# Altium PCB ARM2toARM6Adapter.pcbdoc
Units mm, origin at the board's own origin, x right, y up, seen from the top; angles counter-clockwise.
Board outline 42.62 x 48.77 mm, 4 copper layers (TopLayer, GND, VCC, BottomLayer), stack 1.659 mm thick; 38 components, 87 nets, 340 pads, 154 vias.
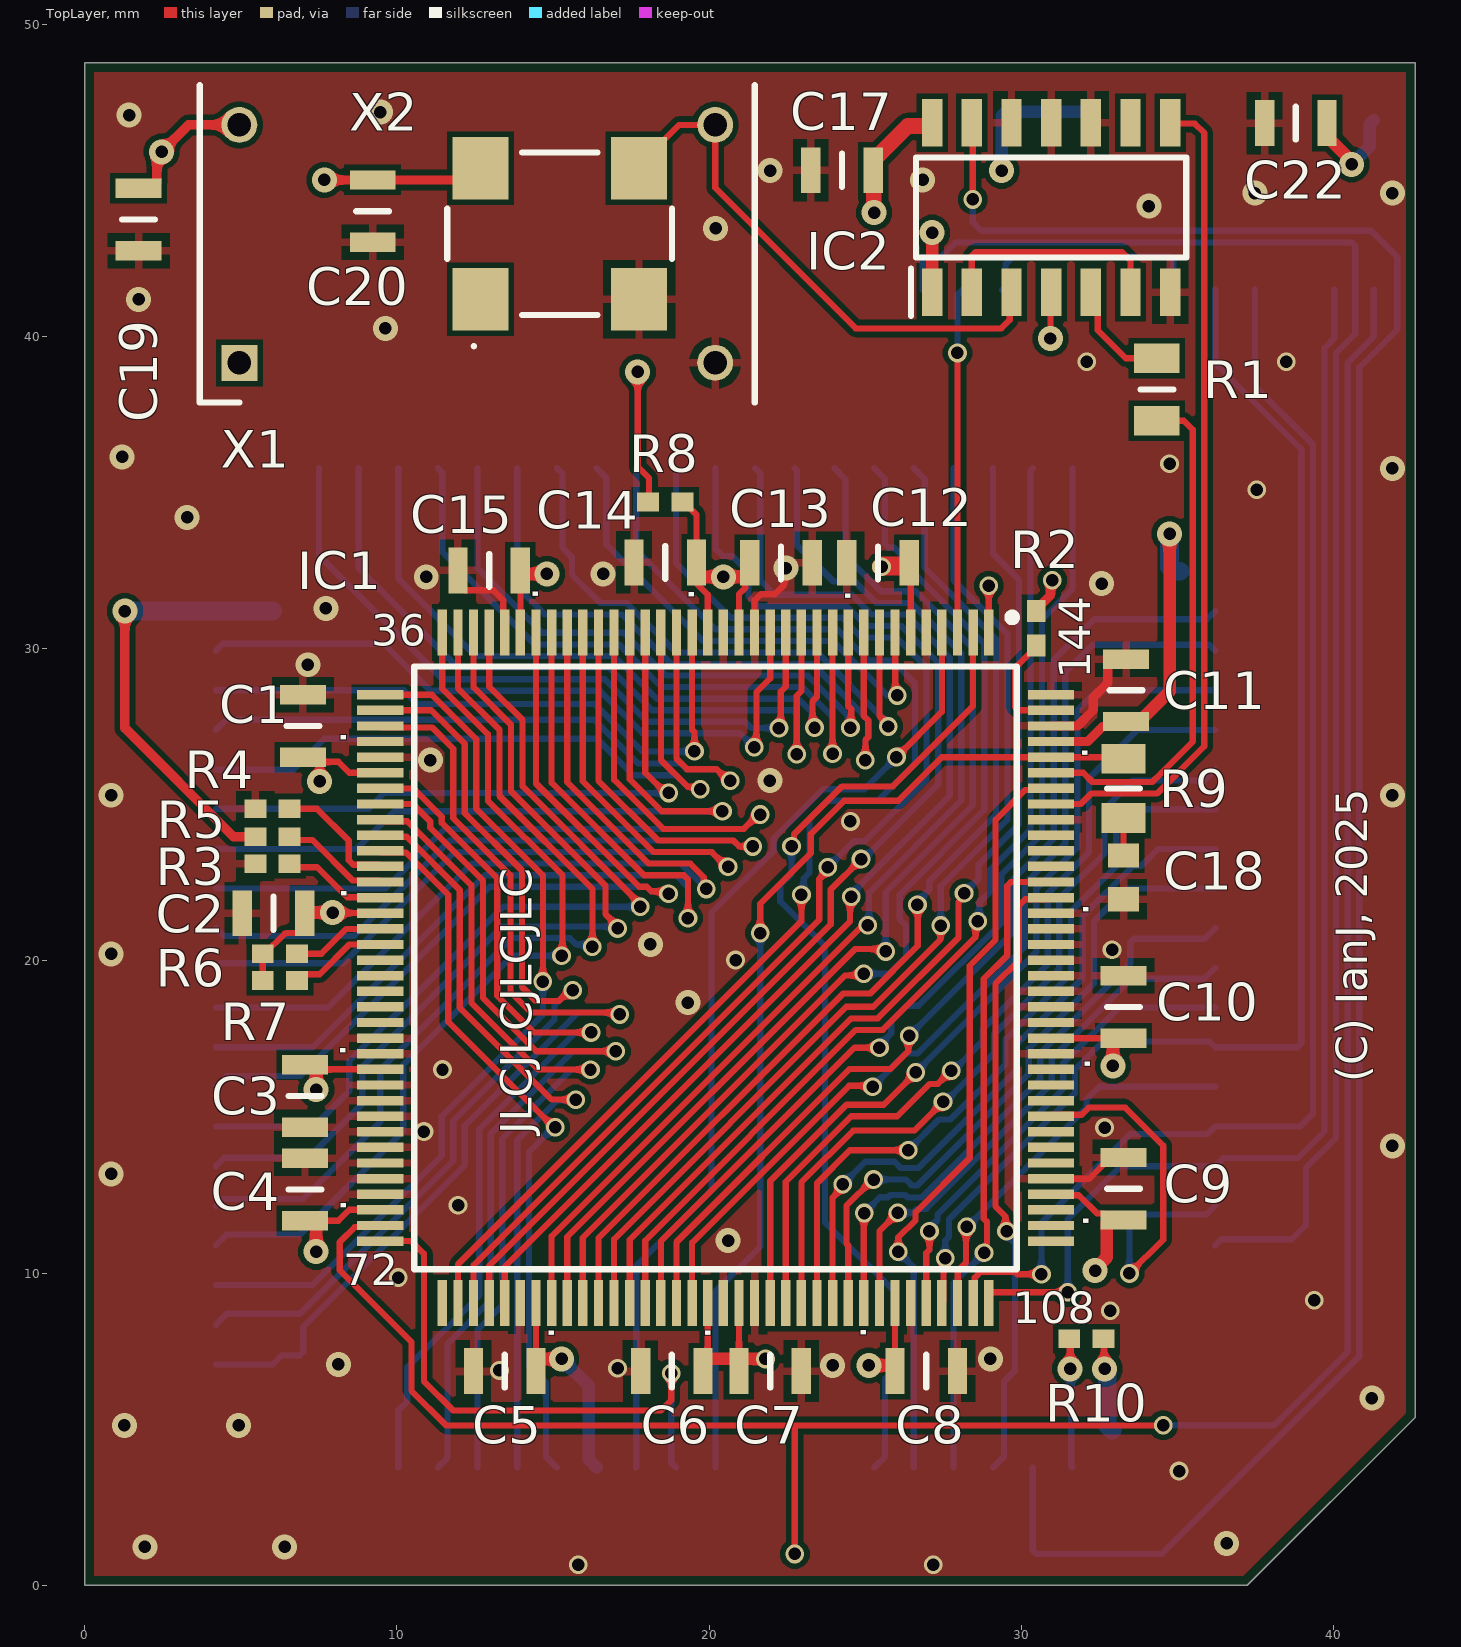
[diagram p0: TopLayer view]
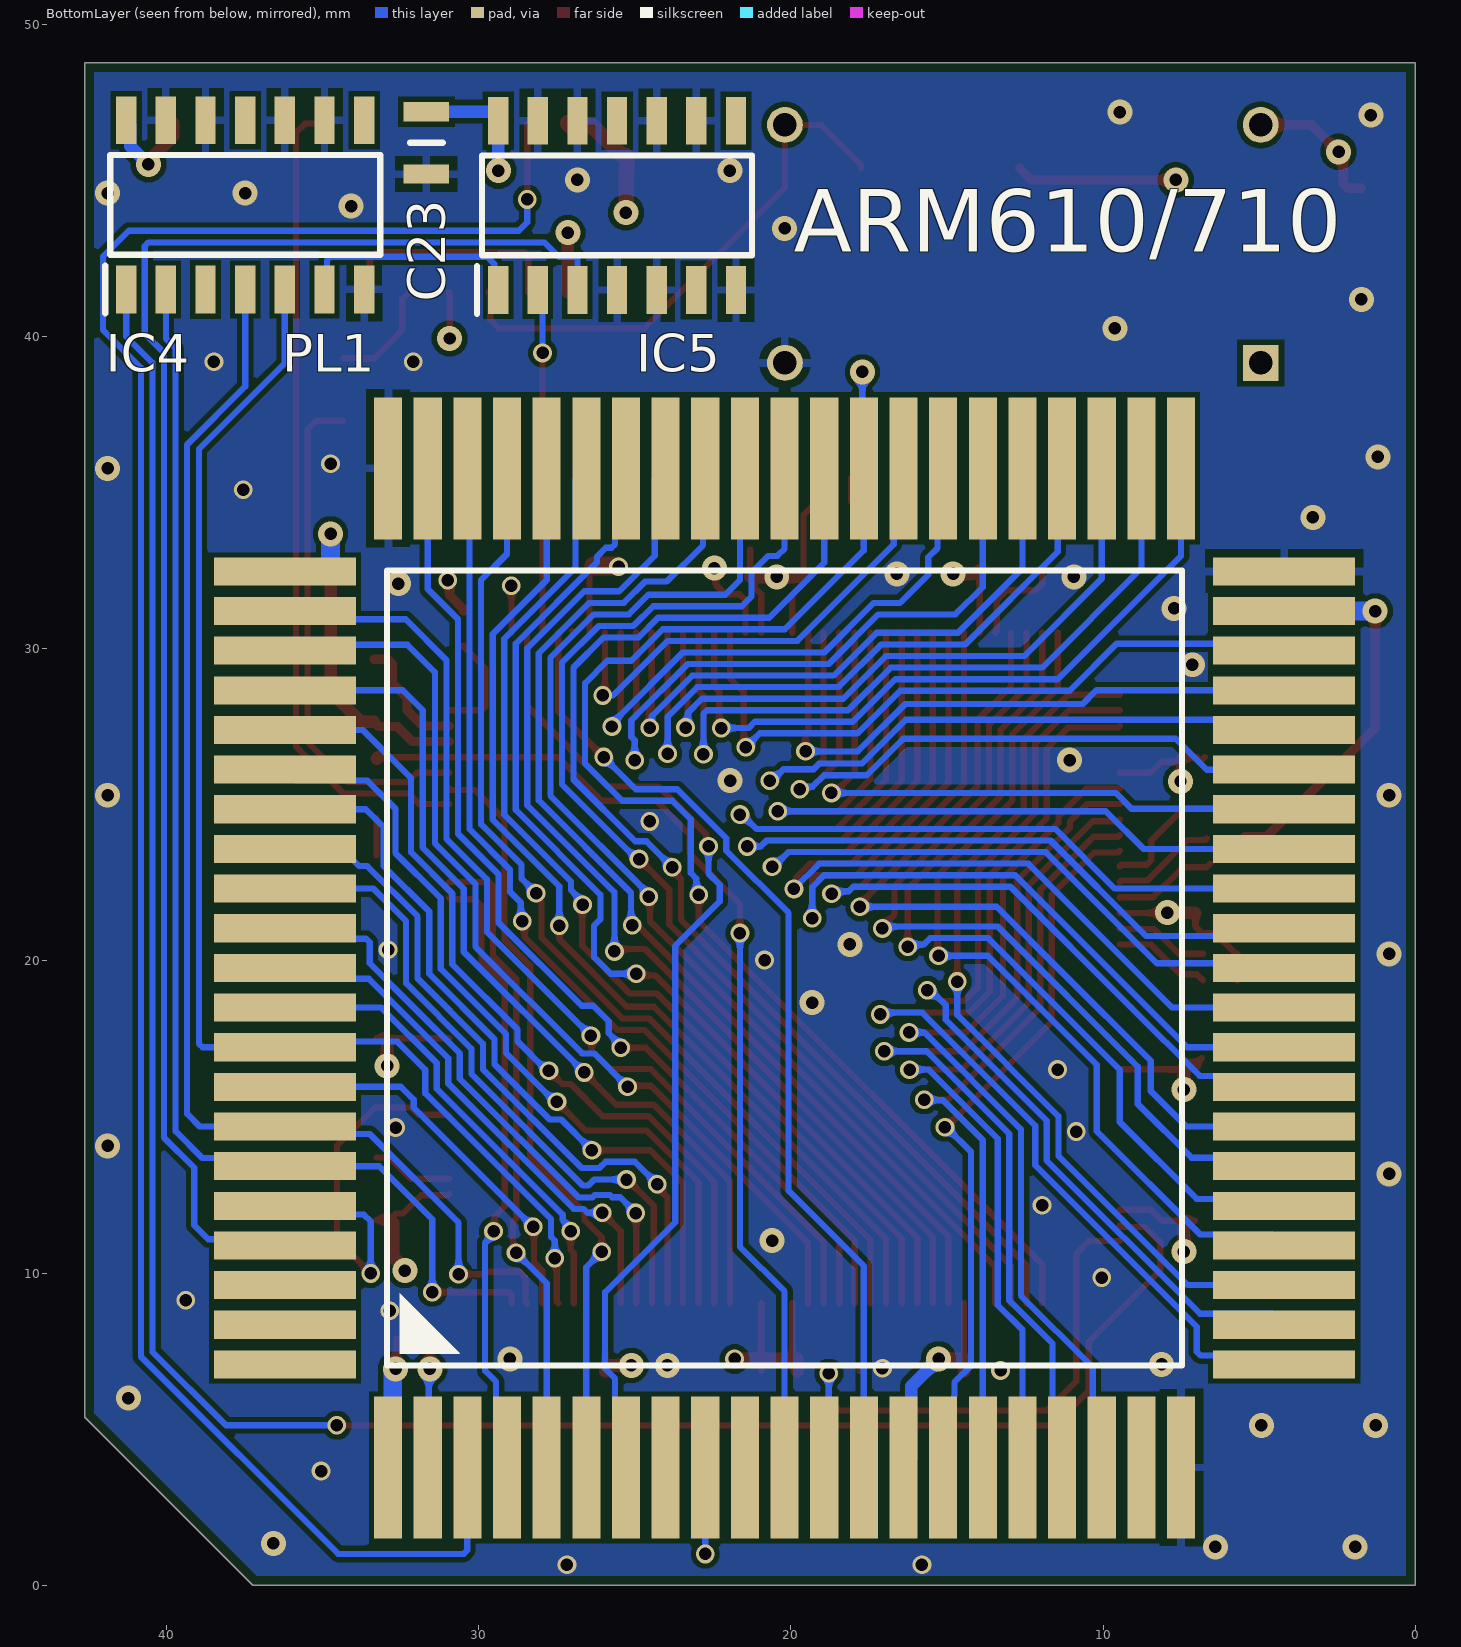
[diagram p1: BottomLayer view, seen from below]
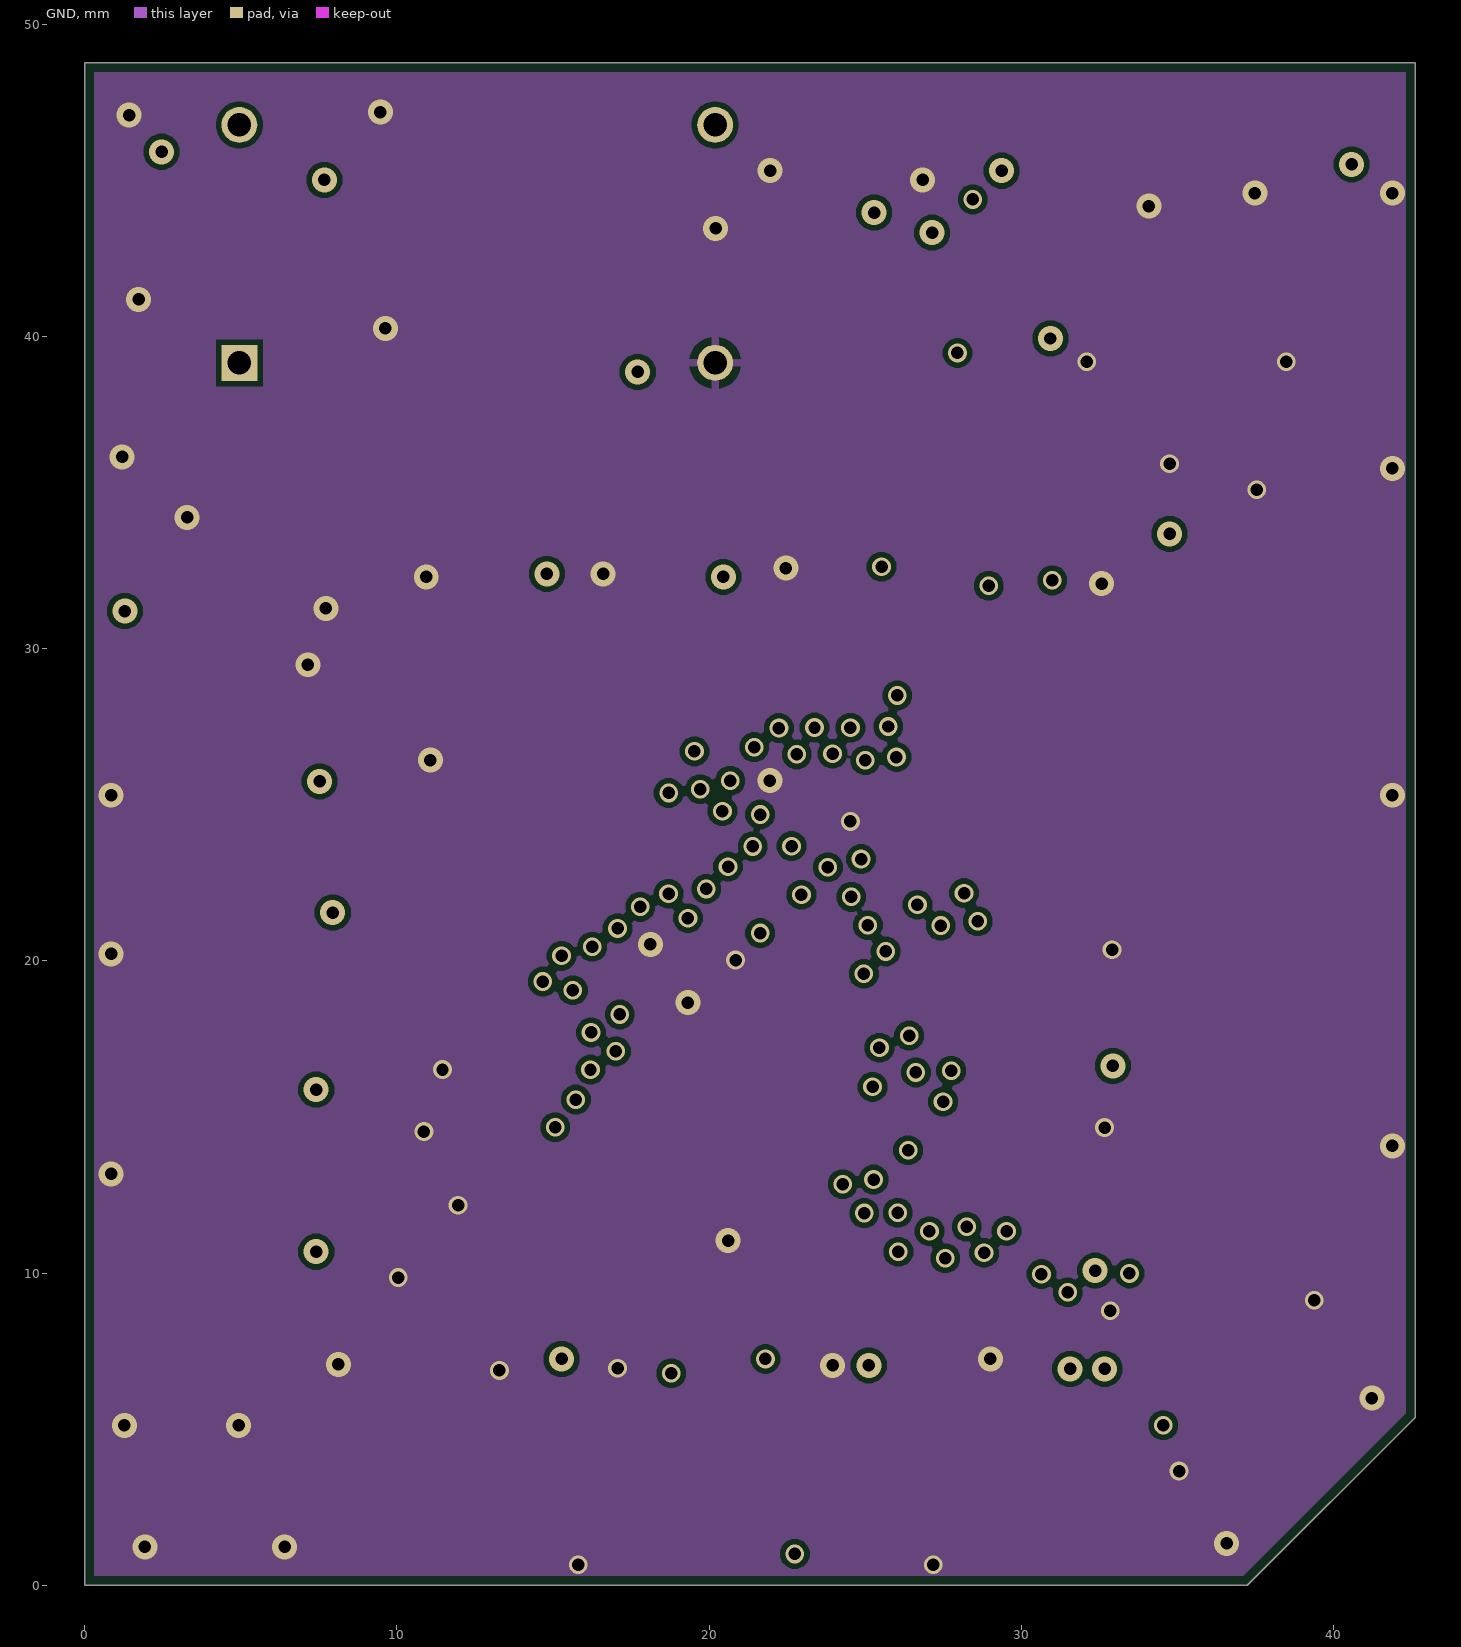
[diagram p2: GND]
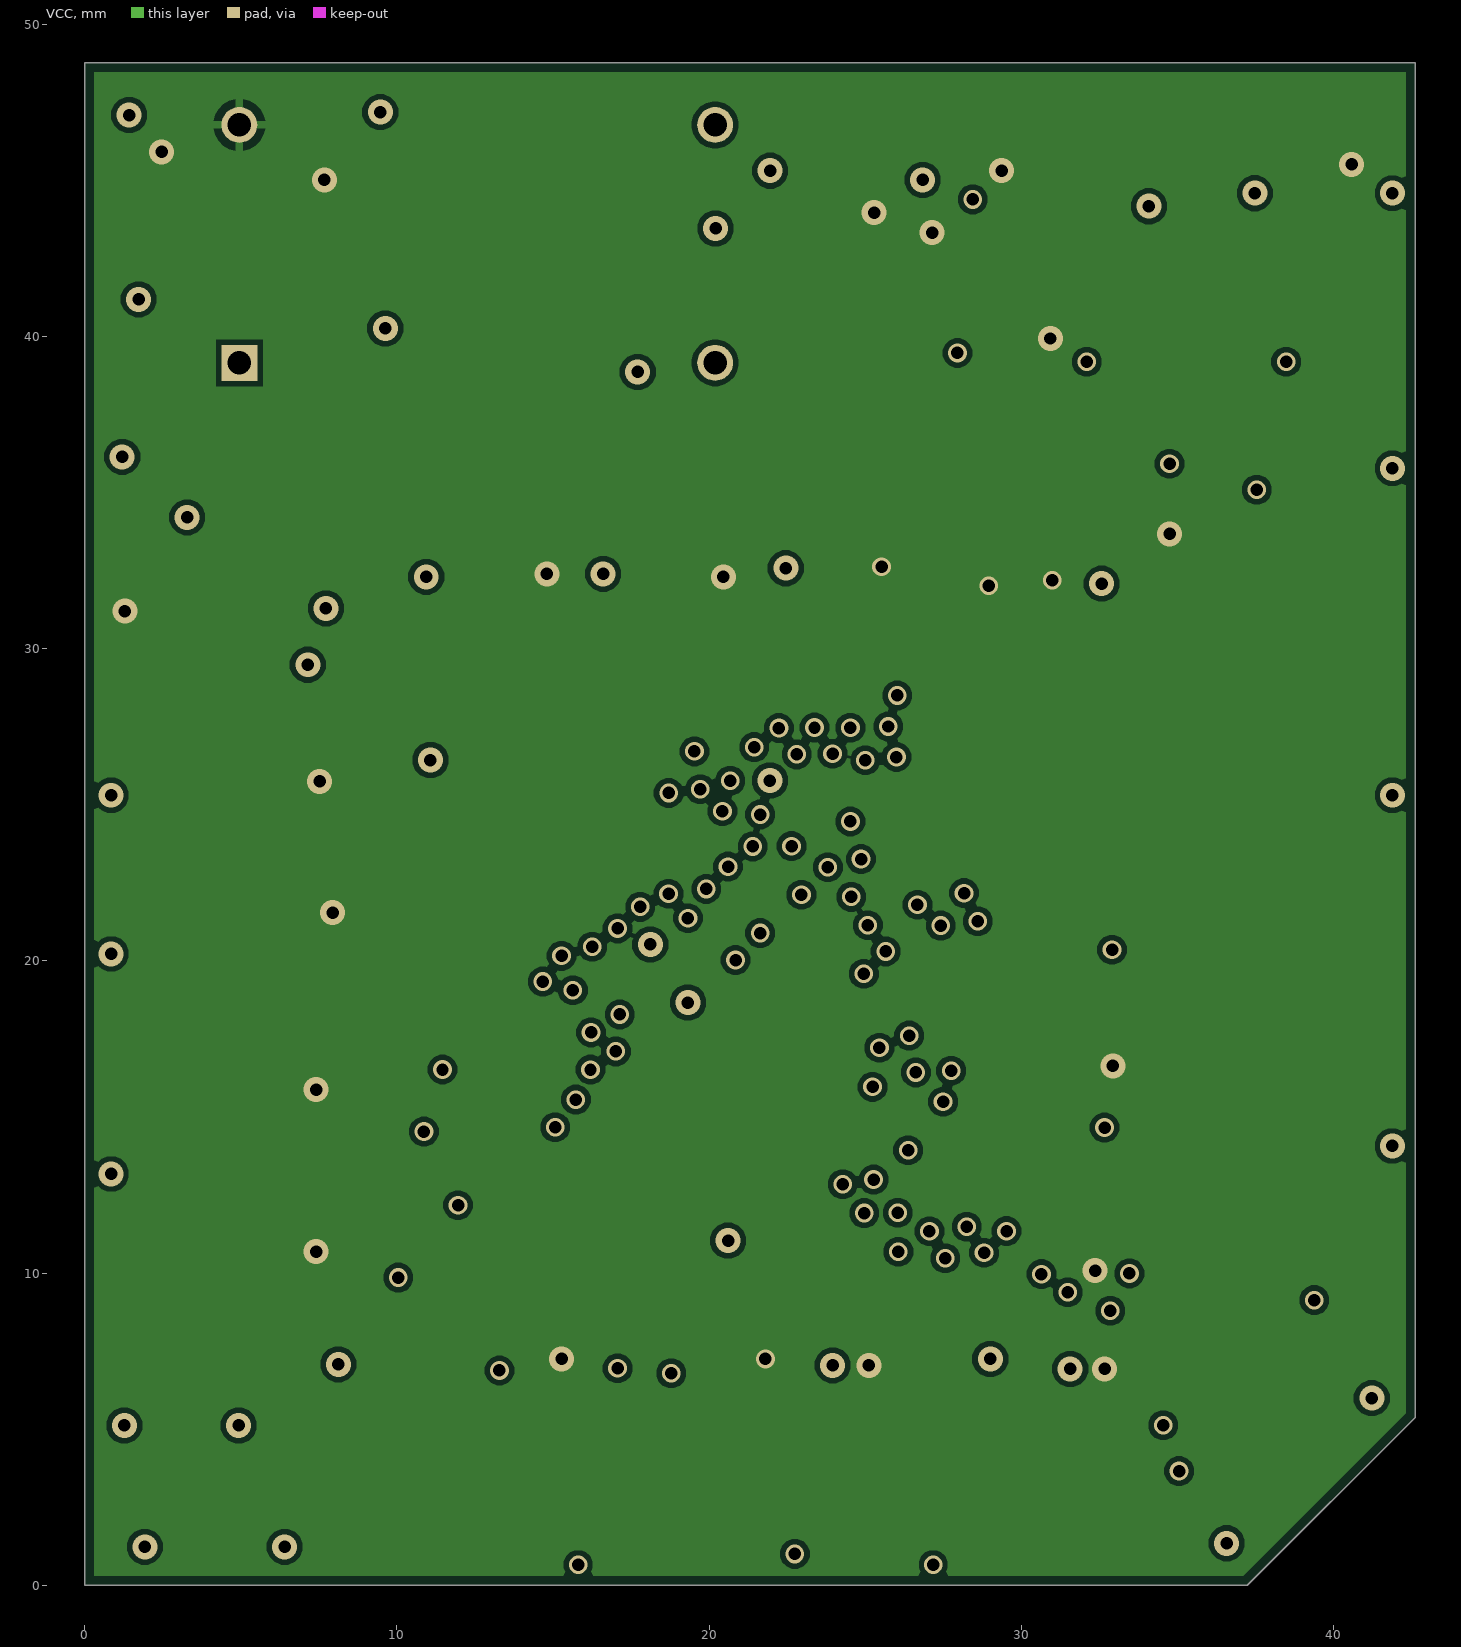
[diagram p3: VCC]
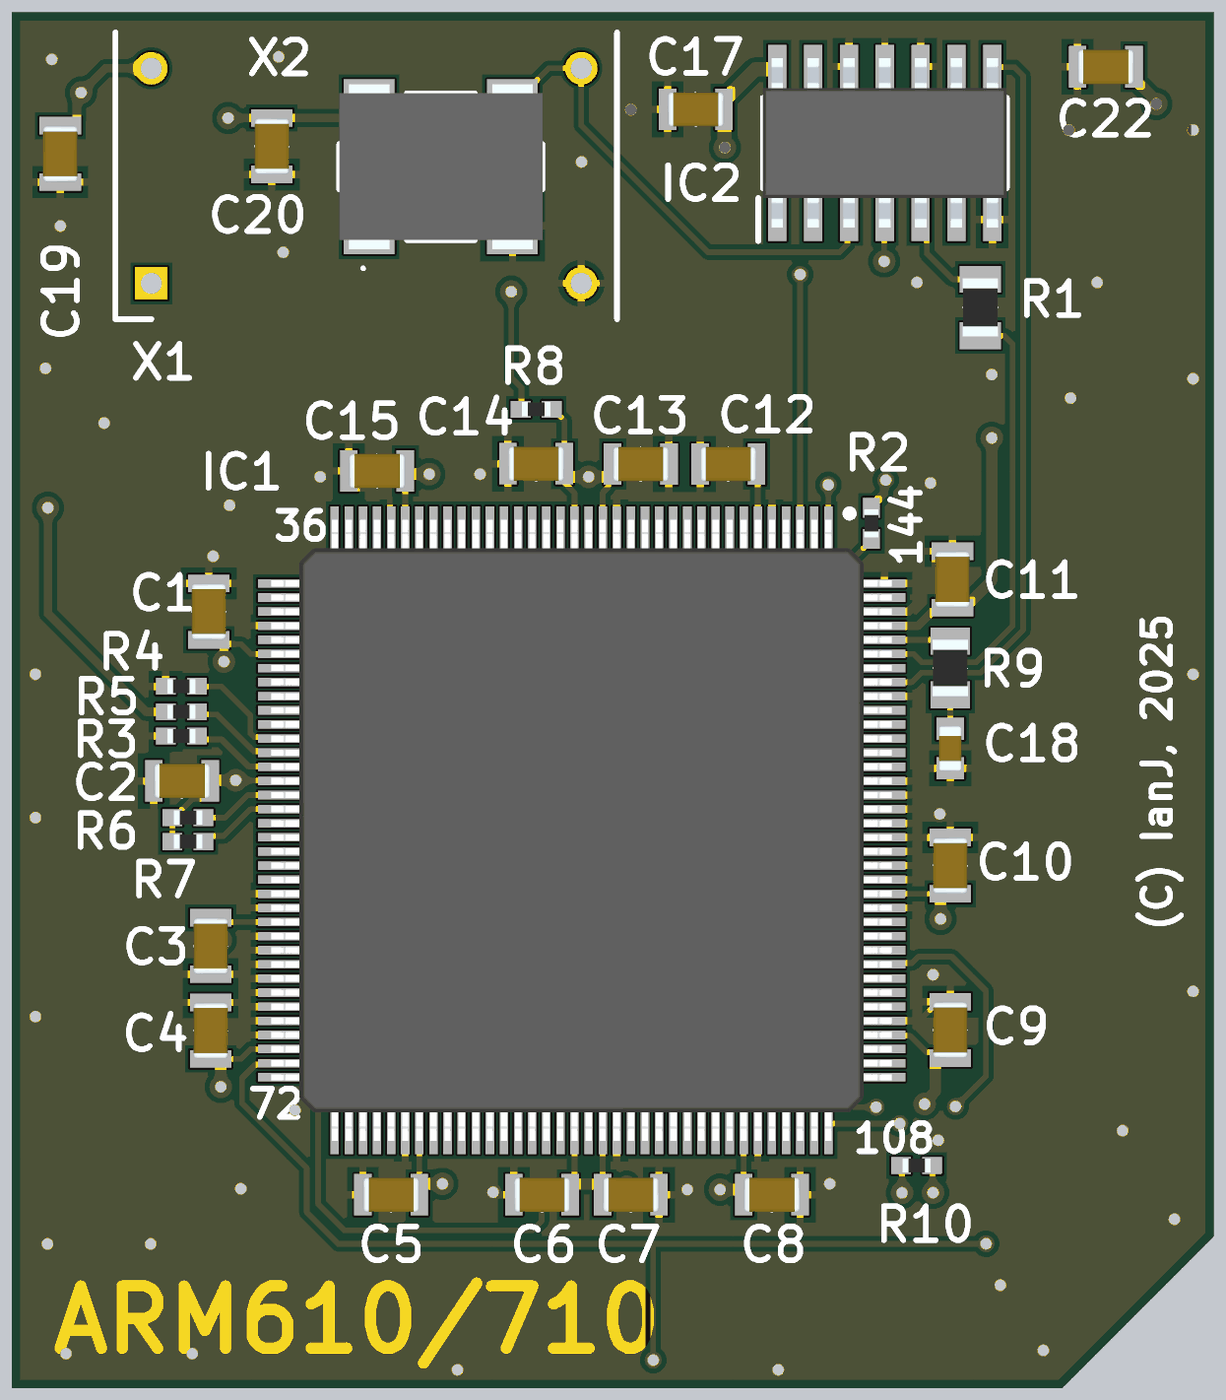
[diagram p4: 3D render of the assembled board from above, using the file's embedded part models]
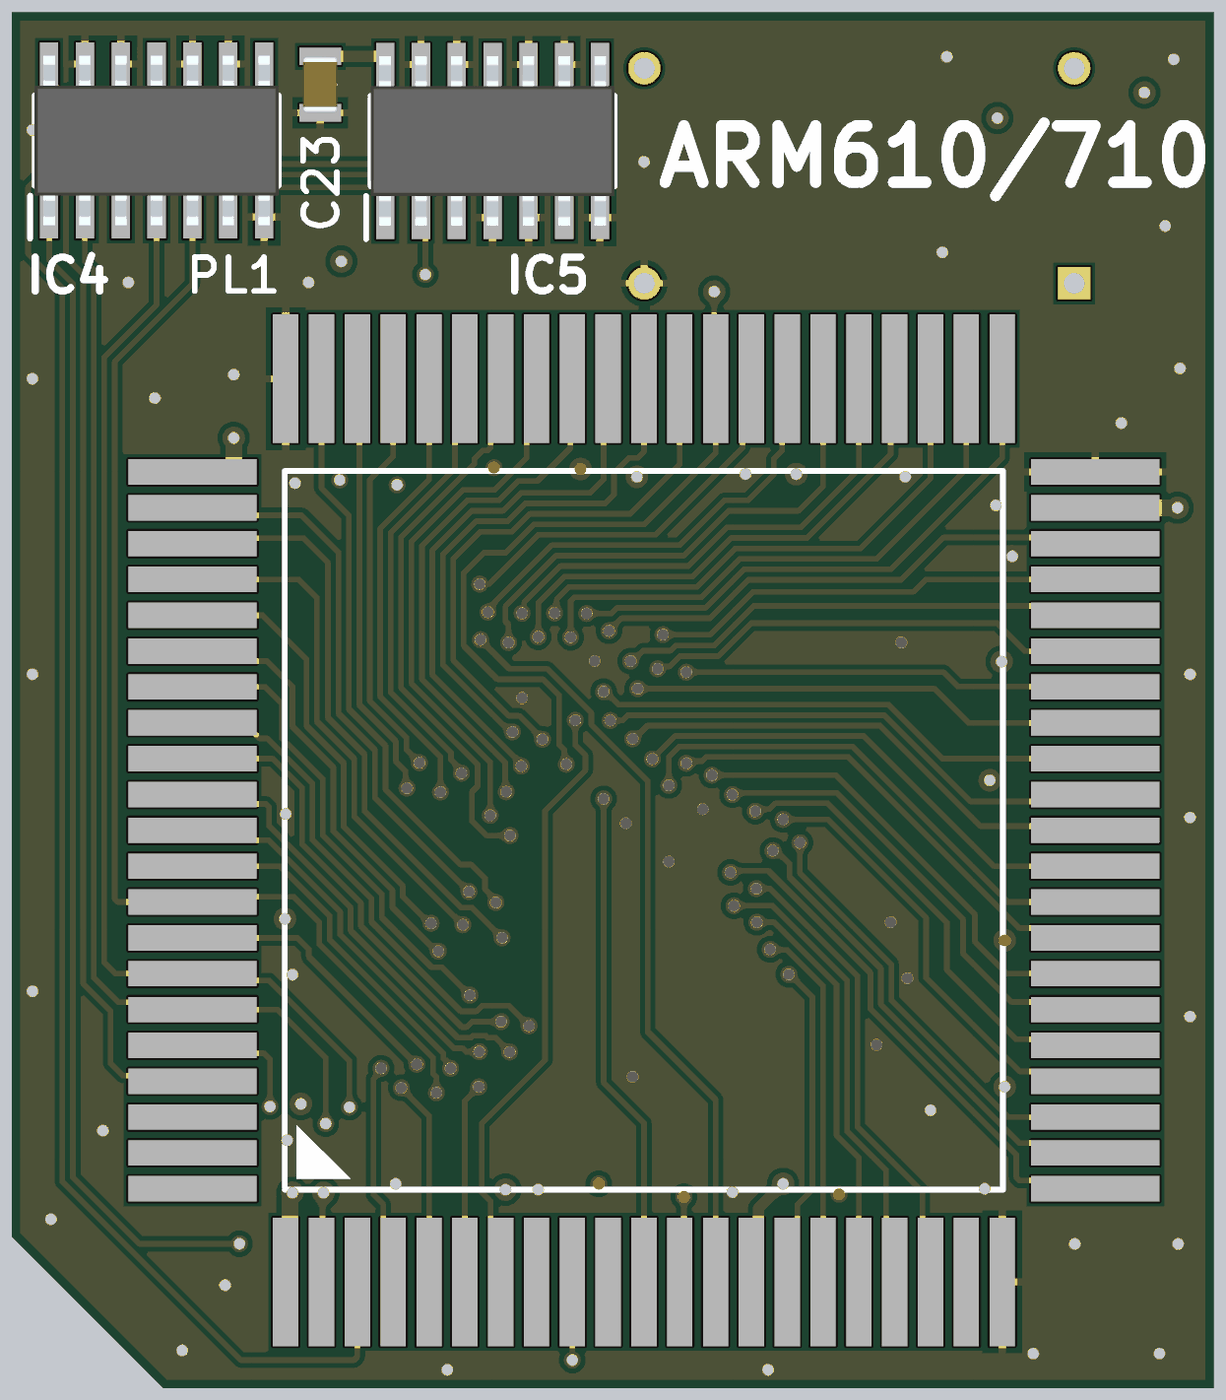
[diagram p5: 3D render of the assembled board from below, using the file's embedded part models]

## Layer stack, top to bottom
TopSolder: solder mask 0.01, Solder Resist, Dk 3.5
TopLayer: signal copper 0.036
Dielectric 1: prepreg 0.2083, PP-022, Dk 4.5
GND: signal copper 0.035
Dielectric 2: core 1.1, Core-043, Dk 4.3
VCC: signal copper 0.035
Dielectric 3: prepreg 0.2083, PP-022, Dk 4.5
BottomLayer: signal copper 0.036
BottomSolder: solder mask 0.01, Solder Resist, Dk 3.5

## Board outline
37.236,0 42.621,5.385 42.621,48.768 0,48.768 0,0

## Design rules (kind name [scope] priority, off if disabled: settings)
BoardOutlineClearance [All] p1: gap=0.3 ignorepadtopadclearanceinfootprint=FALSE
Clearance [All] p1: gap=0.17 ignorepadtopadclearanceinfootprint=FALSE except(0.3: Via-Via; 0.5: Via-Hole)
ComponentClearance ComponentClearance_Z2_Z3 [(InComponent('Z2') OR InComponent('Z3')) vs InComponent('No Component')] p1: gap=0 collisioncheckmode=3 verticalgap=0 showdistances=FALSE
ComponentClearance ComponentClearance_U4_J104 [All] p2: gap=0 collisioncheckmode=3 verticalgap=0 showdistances=FALSE
ComponentClearance ComponentClearance_J3_J4 [InComponent('J3') vs InComponent('J4')] p3: gap=0 collisioncheckmode=3 verticalgap=0 showdistances=FALSE
ComponentClearance ComponentClearance_J103_J104 [InComponent('J103') vs InComponent('J104')] p4: gap=0 collisioncheckmode=3 verticalgap=0 showdistances=FALSE
ComponentClearance [All] p5: gap=0.254 collisioncheckmode=3 verticalgap=0.254 showdistances=FALSE
DiffPairsRouting [InDifferentialPairClass('All Differential Pairs')] p1: maxlimit=0.254 minlimit=0.114 mostfreqgap=0.17 toplayer_mingap=0.17 toplayer_minwidth=0.2 toplayer_maxwidth=0.381 toplayer_prefwidth=0.237 midlayer1_prefgap=0.115 midlayer1_minwidth=0.381 midlayer1_maxwidth=0.381 midlayer1_prefwidth=0.381 midlayer2_prefgap=0.115 midlayer2_minwidth=0.381 midlayer2_maxwidth=0.381 midlayer2_prefwidth=0.381 bottomlayer_mingap=0.17 bottomlayer_minwidth=0.2 bottomlayer_maxwidth=0.381 bottomlayer_prefwidth=0.237 maxuncoupledlength=12.7
FabricationTestPointUsage TestPointUsage [All] p1: valid=0 allowmultiple=FALSE
FabricationTestpoint Testpoint [All] p1: side=3 testpointundercomponent=TRUE minsize=1.016 maxsize=2.54 preferedsize=1.524 minholesize=0.508 maxholesize=1.016 preferedholesize=0.813 testpointgrid=0.025 allowsidetop=TRUE allowsidebottom=TRUE usegrid=TRUE gridtolerance=0
HoleSize [All] p1: absolutevalues=TRUE maxlimit=5.5 minlimit=0.2 maxpercent=80.000 minpercent=20.000
HoleToHoleClearance [All] p1: gap=0.25 allowstackedmicrovias=FALSE
MinimumSolderMaskSliver [All] p1: minsoldermaskwidth=0.02
PlaneClearance [All] p1: clearance=0.2
PlaneConnect [All] p1: pad.planeconnectstyle=Relief pad.reliefexpansion=0.508 pad.reliefentries=4 pad.reliefconductorwidth=0.254 pad.reliefairgap=0.254 via.planeconnectstyle=Direct via.reliefexpansion=0.508 via.reliefentries=4 via.reliefconductorwidth=0.254 via.reliefairgap=0.254
PolygonConnect [All] p1: thpad.connectstyle=Relief thpad.reliefconductorwidth=0.254 thpad.reliefentries=4 thpad.polygonreliefangle="90 Angle" thpad.airgapwidth=0.254 smdpad.connectstyle=Relief smdpad.reliefconductorwidth=0.254 smdpad.reliefentries=4 smdpad.polygonreliefangle="90 Angle" smdpad.airgapwidth=0.254 via.connectstyle=Direct via.reliefconductorwidth=0.254 via.reliefentries=4 via.polygonreliefangle="90 Angle" via.airgapwidth=0.254
RoutingVias [All] p1: holewidth=0.2 width=0.4 viastyle="Through Hole" minholewidth=0.2 minwidth=0.4 maxholewidth=0.4 maxwidth=0.8
SilkToSilkClearance [All] p1: silktosilkclearance=0.1
SilkToSolderMaskClearance SilkscreenOverComponentPads [IsPad] p1: minsilkscreentomaskgap=0.1 clearancetoexposedcopper=TRUE
SolderMaskExpansion [All] p1: expansion=0.075 istentingtop=FALSE
SupplyNets "Schematic Supply Nets_2" [InNet('VCC')] p1: voltage=0.000
SupplyNets "Schematic Supply Nets_1" [InNet('GND')] p2: voltage=0.000
Width [All] p1: maxlimit=5 minlimit=0.15 preferedwidth=0.2
19 further rules are at their usual default settings.

## Classes and differential pairs
net class D[0..31]: D0 D1 D2 D3 D4 D5 D6 D7 D8 D9 D10 D11 D12 D13 D14 D15 D16 D17 D18 D19 D20 D21 D22 D23 D24 D25 D26 D27 D28 D29 D30 D31
net class A[0..25]: A0 A1 A2 A3 A4 A5 A6 A7 A8 A9 A10 A11 A12 A13 A14 A15 A16 A17 A18 A19 A20 A21 A22 A23 A24 A25

## Components (designator, comment, footprint, x,y, rotation, side; value= is the part's Value field where it differs from the comment)
C1 "100nF" CAPC2012X145N 6.989,27.525 r90 top
C2 "100nF" CAPC2012X145N 6.045,21.525 r180 top
C3 "100nF" CAPC2012X145N 7.055,15.675 r270 top
C4 "100nF" CAPC2012X145N 7.055,12.675 r90 top
C5 "100nF" CAPC2012X145N 13.455,6.862 r180 top
C6 "100nF" CAPC2012X145N 18.805,6.862 r180 top
C7 "100nF" CAPC2012X145N 21.955,6.862 r0 top
C8 "100nF" CAPC2012X145N 26.955,6.862 r0 top
C9 "100nF" CAPC2012X145N 33.274,12.702 r90 top
C10 "100nF" CAPC2012X145N 33.274,18.525 r90 top
C11 "100nF" CAPC2012X145N 33.355,28.665 r90 top
C12 "100nF" CAPC2012X145N 25.407,32.751 r180 top
C13 "100nF" CAPC2012X145N 22.305,32.751 r0 top
C14 "100nF" CAPC2012X145N 18.596,32.765 r180 top
C15 "100nF" CAPC2012X145N 12.955,32.506 r180 top
C17 "100nF" CAPC2012X145N 24.256,45.323 r180 top
C18 "22pF" CAPC1608X90N 33.274,22.675 r90 top
C19 "100nF" CAPC2012X145N 1.727,43.743 r270 top
C20 "100nF" CAPC2012X145N 9.225,44.013 r270 top
C22 "100nF" CAPC2012X145N 38.791,46.832 r180 top
C23 "100nF" CAPC2012X145N 31.681,46.201 r270 bottom
IC1 "ARM610" TQFP144 20.205,19.775 r270 top locked
IC2 "CD74ACT74M" SOIC127P600X175-14N 30.955,44.13 r90 top locked
IC4 "74HC20D,652" SOIC127P600X175-14N 37.481,44.215 r90 bottom
IC5 "74ACT08MTC" SOIC127P600X175-14N 25.57,44.199 r90 bottom
PL1 "PLCC84 PLUG (ARM2)" PLCC84_PLUG 20.205,19.775 r0 bottom locked
R1 "CRCW080568R0FKEA" RESC2012X50N 34.341,38.303 r270 top value=68R
R2 "4K7" RESC1005X35N 30.478,30.655 r90 top
R3 "4K7" RESC1005X35N 6.015,23.115 r0 top
R4 "10K" RESC1005X35N 6.015,24.876 r0 top
R5 "4K7" RESC1005X35N 6.015,23.975 r180 top
R6 "4K7" RESC1005X35N 6.254,20.225 r180 top
R7 "4K7" RESC1005X35N 6.254,19.375 r180 top
R8 "4K7" RESC1005X35N 18.596,34.695 r0 top
R9 "100R" RESC2012X60N 33.274,25.525 r90 top
R10 "4K7" RESC1005X35N 32.085,7.895 r0 top
X1 "60MHz OSC (THT)" DIPS762W56P1524L1778H241Q4N 4.953,39.156 r90 top
X2 "60MHz OSC (SMT)" LFSPXO018035Bulk 15.215,43.289 r0 top

## Footprints (in the part's own frame and the unit in brackets; to place one, negate y for a bottom-side part, rotate by r counter-clockwise, add the part's x,y. Pads: shape width x height; smd on the part's side, far side on the other; paste and mask are expansions set on the pad)
CAPC1608X90N [mm]
  rect 0.78x0.99 smd: 1(-0.7,0) 2(0.7,0)
  body extent -0.8,-0.41 0.8,0.41, height 0.9
CAPC2012X145N [mm]
  rect 0.62x1.47 smd: 1(-1,0) 2(1,0)
  silkscreen extent 0,-0.53 0,0.53, body extent -1,-0.63 1,0.63, height 1.45
DIPS762W56P1524L1778H241Q4N [mm]
  rect 1.15x1.15 hole 0.75: 1(0,0)
  round 1.15 hole 0.75: 2(0,-15.24) 3(7.62,-15.24) 4(7.62,0)
  silkscreen extent -1.27,-16.51 8.89,1.27
LFSPXO018035Bulk [mm]
  rect 1.8x2 smd: 1(-2.54,-2.1) 2(2.54,-2.1) 3(2.54,2.1) 4(-2.54,2.1)
  silkscreen extent -3.6,-3.65 3.6,2.6, body extent -3.6,-2.92 3.6,2.92, height 1.5
PLCC84_PLUG [mm] "PLCC84 plug (reversed pin map)"
  rect 0.9x4.55 smd: 1(0,16.002) 2(1.27,16.002) 3(2.54,16.002) 4(3.81,16.002) 5(5.08,16.002) 6(6.35,16.002) 7(7.62,16.002) 8(8.89,16.002) 9(10.16,16.002) 10(11.43,16.002) 11(12.7,16.002) 33(12.7,-16.002) 34(11.43,-16.002) 35(10.16,-16.002) 36(8.89,-16.002) 37(7.62,-16.002) 38(6.35,-16.002) 39(5.08,-16.002) 40(3.81,-16.002) 41(2.54,-16.002) 42(1.27,-16.002) 43(0,-16.002) 44(-1.27,-16.002) 45(-2.54,-16.002) 46(-3.81,-16.002) 47(-5.08,-16.002) 48(-6.35,-16.002) 49(-7.62,-16.002) 50(-8.89,-16.002) 51(-10.16,-16.002) 52(-11.43,-16.002) 53(-12.7,-16.002) 75(-12.7,16.002) 76(-11.43,16.002) 77(-10.16,16.002) 78(-8.89,16.002) 79(-7.62,16.002) 80(-6.35,16.002) 81(-5.08,16.002) 82(-3.81,16.002) 83(-2.54,16.002) 84(-1.27,16.002)
  rect 4.55x0.9 smd: 12(16.002,12.7) 13(16.002,11.43) 14(16.002,10.16) 15(16.002,8.89) 16(16.002,7.62) 17(16.002,6.35) 18(16.002,5.08) 19(16.002,3.81) 20(16.002,2.54) 21(16.002,1.27) 22(16.002,0) 23(16.002,-1.27) 24(16.002,-2.54) 25(16.002,-3.81) 26(16.002,-5.08) 27(16.002,-6.35) 28(16.002,-7.62) 29(16.002,-8.89) 30(16.002,-10.16) 31(16.002,-11.43) 32(16.002,-12.7) 54(-16.002,-12.7) 55(-16.002,-11.43) 56(-16.002,-10.16) 57(-16.002,-8.89) 58(-16.002,-7.62) 59(-16.002,-6.35) 60(-16.002,-5.08) 61(-16.002,-3.81) 62(-16.002,-2.54) 63(-16.002,-1.27) 64(-16.002,0) 65(-16.002,1.27) 66(-16.002,2.54) 67(-16.002,3.81) 68(-16.002,5.08) 69(-16.002,6.35) 70(-16.002,7.62) 71(-16.002,8.89) 72(-16.002,10.16) 73(-16.002,11.43) 74(-16.002,12.7)
  silkscreen extent -12.73,-12.73 12.73,12.73
RESC1005X35N [mm]
  rect 0.7x0.6 smd: 1(-0.55,0) 2(0.55,0)
  body extent -0.5,-0.25 0.5,0.25, height 0.35
RESC2012X50N [mm]
  rect 0.95x1.45 smd: 1(-1,0) 2(1,0)
  silkscreen extent 0,-0.53 0,0.53, body extent -1.02,-0.63 1.02,0.63, height 0.5
RESC2012X60N [mm]
  rect 0.95x1.4 smd: 1(-0.95,0) 2(0.95,0)
  silkscreen extent 0,-0.53 0,0.53, body extent -1,-0.63 1,0.63, height 0.6
SOIC127P600X175-14N [mm]
  rect 1.525x0.65 smd: 1(-2.712,3.81) 2(-2.712,2.54) 3(-2.712,1.27) 4(-2.712,0) 5(-2.712,-1.27) 6(-2.712,-2.54) 7(-2.712,-3.81) 8(2.712,-3.81) 9(2.712,-2.54) 10(2.712,-1.27) 11(2.712,0) 12(2.712,1.27) 13(2.712,2.54) 14(2.712,3.81)
  silkscreen extent -3.47,-4.33 1.6,4.48, body extent -3,-4.33 3,4.33, height 1.75
TQFP144 [mm]
  rect 1.475x0.3 smd: 1(-10.738,8.75) 2(-10.738,8.25) 3(-10.738,7.75) 4(-10.738,7.25) 5(-10.738,6.75) 6(-10.738,6.25) 7(-10.738,5.75) 8(-10.738,5.25) 9(-10.738,4.75) 10(-10.738,4.25) 11(-10.738,3.75) 12(-10.738,3.25) 13(-10.738,2.75) 14(-10.738,2.25) 15(-10.738,1.75) 16(-10.738,1.25) 17(-10.738,0.75) 18(-10.738,0.25) 19(-10.738,-0.25) 20(-10.738,-0.75) 21(-10.738,-1.25) 22(-10.738,-1.75) 23(-10.738,-2.25) 24(-10.738,-2.75) 25(-10.738,-3.25) 26(-10.738,-3.75) 27(-10.738,-4.25) 28(-10.738,-4.75) 29(-10.738,-5.25) 30(-10.738,-5.75) 31(-10.738,-6.25) 32(-10.738,-6.75) 33(-10.738,-7.25) 34(-10.738,-7.75) 35(-10.738,-8.25) 36(-10.738,-8.75) 73(10.738,-8.75) 74(10.738,-8.25) 75(10.738,-7.75) 76(10.738,-7.25) 77(10.738,-6.75) 78(10.738,-6.25) 79(10.738,-5.75) 80(10.738,-5.25) 81(10.738,-4.75) 82(10.738,-4.25) 83(10.738,-3.75) 84(10.738,-3.25) 85(10.738,-2.75) 86(10.738,-2.25) 87(10.738,-1.75) 88(10.738,-1.25) 89(10.738,-0.75) 90(10.738,-0.25) 91(10.738,0.25) 92(10.738,0.75) 93(10.738,1.25) 94(10.738,1.75) 95(10.738,2.25) 96(10.738,2.75) 97(10.738,3.25) 98(10.738,3.75) 99(10.738,4.25) 100(10.738,4.75) 101(10.738,5.25) 102(10.738,5.75) 103(10.738,6.25) 104(10.738,6.75) 105(10.738,7.25) 106(10.738,7.75) 107(10.738,8.25) 108(10.738,8.75)
  rect 0.3x1.475 smd: 37(-8.75,-10.738) 38(-8.25,-10.738) 39(-7.75,-10.738) 40(-7.25,-10.738) 41(-6.75,-10.738) 42(-6.25,-10.738) 43(-5.75,-10.738) 44(-5.25,-10.738) 45(-4.75,-10.738) 46(-4.25,-10.738) 47(-3.75,-10.738) 48(-3.25,-10.738) 49(-2.75,-10.738) 50(-2.25,-10.738) 51(-1.75,-10.738) 52(-1.25,-10.738) 53(-0.75,-10.738) 54(-0.25,-10.738) 55(0.25,-10.738) 56(0.75,-10.738) 57(1.25,-10.738) 58(1.75,-10.738) 59(2.25,-10.738) 60(2.75,-10.738) 61(3.25,-10.738) 62(3.75,-10.738) 63(4.25,-10.738) 64(4.75,-10.738) 65(5.25,-10.738) 66(5.75,-10.738) 67(6.25,-10.738) 68(6.75,-10.738) 69(7.25,-10.738) 70(7.75,-10.738) 71(8.25,-10.738) 72(8.75,-10.738) 109(8.75,10.738) 110(8.25,10.738) 111(7.75,10.738) 112(7.25,10.738) 113(6.75,10.738) 114(6.25,10.738) 115(5.75,10.738) 116(5.25,10.738) 117(4.75,10.738) 118(4.25,10.738) 119(3.75,10.738) 120(3.25,10.738) 121(2.75,10.738) 122(2.25,10.738) 123(1.75,10.738) 124(1.25,10.738) 125(0.75,10.738) 126(0.25,10.738) 127(-0.25,10.738) 128(-0.75,10.738) 129(-1.25,10.738) 130(-1.75,10.738) 131(-2.25,10.738) 132(-2.75,10.738) 133(-3.25,10.738) 134(-3.75,10.738) 135(-4.25,10.738) 136(-4.75,10.738) 137(-5.25,10.738) 138(-5.75,10.738) 139(-6.25,10.738) 140(-6.75,10.738) 141(-7.25,10.738) 142(-7.75,10.738) 143(-8.25,10.738) 144(-8.75,10.738)
  silkscreen extent -11.35,-9.65 9.65,9.65, body extent -11,-11 11,11, height 1.51

## Part data
C1 C2 C3 C4 C5 C6 C7 C8 C9 C10 C11 C12 C13 C14 C15 C17 C19 C20 C22 C23: library part C2012X7R1H104K125AM, "Capacitor", Manufacturer_Name=TDK, Mouser Part Number=810-C2012X7R1H104KT5, Arrow Part Number=C2012X7R1H104K125AM, Arrow Price/Stock=https://www.arrow.com/en/products/c2012x7r1h104k125am/tdk, Datasheet Link=https://product.tdk.com/info/en/catalog/datasheets/mlcc_commercial_midvoltage_en.pdf, Height=1.45mm, Manufacturer_Part_Number=C2012X7R1H104K125AM, Mouser Price/Stock=https://www.mouser.com/Search/Refine.aspx?Keyword=810-C2012X7R1H104KT5
C18: library part CGA3E2NP02A220J080AA, "Capacitor", Manufacturer_Name=TDK, Mouser Part Number=810-CGA3E2NP02A220JA, Datasheet Link=http://docs-europe.electrocomponents.com/webdocs/14e9/0900766b814e9125.pdf, Height=0.9mm, Manufacturer_Part_Number=CGA3E2NP02A220J080AA
IC1: library part VY86C610, Manufacturer_Name=VLSI, Manufacturer_Part_Number=VY86C610C, Height=1.6mm
IC2: "Integrated Circuit", Manufacturer_Name="Texas Instruments", Mouser Part Number=595-CD74ACT74M, Datasheet Link=http://www.ti.com/lit/ds/symlink/cd74act74.pdf, Height=1.75mm, Manufacturer_Part_Number=CD74ACT74M, Mouser Price/Stock=https://www.mouser.com/Search/Refine.aspx?Keyword=595-CD74ACT74M
IC4: "Integrated Circuit", Manufacturer_Name=Nexperia, Mouser Part Number=771-74HC20D, Arrow Part Number=74HC20D,652, Arrow Price/Stock=https://www.arrow.com/en/products/74hc20d652/nexperia?utm_currency=USD&region=nac, Datasheet Link=https://assets.nexperia.com/documents/data-sheet/74HC20.pdf, Height=1.75mm, Manufacturer_Part_Number=74HC20D,652, Mouser Price/Stock=https://www.mouser.co.uk/ProductDetail/Nexperia/74HC20D652?qs=P62ublwmbi%252BDockmVLpVUA%3D%3D
IC5: "Integrated Circuit", Manufacturer_Name=onsemi, Mouser Part Number=512-74ACT08MTC, Arrow Part Number=74ACT08MTC, Arrow Price/Stock=https://www.arrow.com/en/products/74act08mtc/on-semiconductor?region=europe, Datasheet Link=https://www.onsemi.com/pdf/datasheet/74act08-d.pdf, Height=1.75mm, Manufacturer_Part_Number=74ACT08MTC, Mouser Price/Stock=https://www.mouser.co.uk/ProductDetail/onsemi-Fairchild/74ACT08MTC?qs=XVly9zr84oLwIH6jjYyBlA%3D%3D
PL1: library part PLCC84_PLUG_ARM2, "PLCC84 Plug", Manufacturer_Name=Winslow, Manufacturer_Part_Number=W9328, Height=15mm
R1: "68R Resistor", Manufacturer_Name=Vishay, Mouser Part Number=71-CRCW080568R0FKEA, Arrow Part Number=CRCW080568R0FKEA, Arrow Price/Stock=https://www.arrow.com/en/products/crcw080568r0fkea/vishay, Datasheet Link=http://www.vishay.com/docs/20035/dcrcwe3.pdf, Height=0.5mm, Manufacturer_Part_Number=CRCW080568R0FKEA, Mouser Price/Stock=https://www.mouser.com/Search/Refine.aspx?Keyword=71-CRCW080568R0FKEA
R2 R3 R5 R6 R7 R8 R10: library part CPF0402B4K75E1, "Resistor", Manufacturer_Name="TE Connectivity", Mouser Part Number=279-CPF0402B4K75E1, Arrow Part Number=CPF0402B4K75E1, Arrow Price/Stock=https://www.arrow.com/en/products/cpf0402b4k75e1/te-connectivity, Datasheet Link=http://www.farnell.com/datasheets/1786775.pdf, Height=0.35mm, Manufacturer_Part_Number=CPF0402B4K75E1, Mouser Price/Stock=https://www.mouser.co.uk/ProductDetail/TE-Connectivity-Holsworthy/CPF0402B4K75E1?qs=n4i9pByFsMQxVicXLOMgxw%3D%3D
R4: library part CPF0402B10K5E, "Resistor", Manufacturer_Name="TE Connectivity", Mouser Part Number=N/A, Arrow Part Number=CPF0402B10K5E, Arrow Price/Stock=https://www.arrow.com/en/products/cpf0402b10k5e/te-connectivity?region=nac, Datasheet Link=http://www.farnell.com/datasheets/1786775.pdf, Height=0.35mm, Manufacturer_Part_Number=CPF0402B10K5E, Mouser Price/Stock=https://www.mouser.co.uk/ProductDetail/TE-Connectivity-Neohm/CPF0402B10K5E?qs=chTDxNqvsymW8ByynyC5nA%3D%3D
R9: library part CRCW0805100RFKEAC, "Resistor", Manufacturer_Name=Vishay, Mouser Part Number=71-CRCW0805100RFKEAC, Arrow Part Number=CRCW0805100RFKEAC, Arrow Price/Stock=https://www.arrow.com/en/products/crcw0805100rfkeac/vishay?region=nac, Datasheet Link=https://componentsearchengine.com/Datasheets/1/CRCW0805100RFKEAC.pdf, Height=0.6mm, Manufacturer_Part_Number=CRCW0805100RFKEAC, Mouser Price/Stock=https://www.mouser.co.uk/ProductDetail/Vishay-Dale/CRCW0805100RFKEAC?qs=E3Y5ESvWgWM6LN%2Fsc41QGg%3D%3D
X1: library part 1107741, "60MHz OSC", Manufacturer_Name=ARIES, Mouser Part Number=535-1107741, Datasheet Link=http://docs-emea.rs-online.com/webdocs/13f3/0900766b813f3237.pdf, Height=2.41mm, Manufacturer_Part_Number=1107741, Mouser Price/Stock=https://www.mouser.co.uk/ProductDetail/Aries-Electronics/1107741?qs=WZRMhwwaLl%2FApwqojhfzdA%3D%3D
X2: library part LFSPXO018035Bulk, "Crystal or Oscillator", Manufacturer_Name=IQD, Mouser Part Number=449-LFSPXO018035BULK, Datasheet Link=https://www.iqdfrequencyproducts.com/products/pn/LFSPXO018035Bulk.pdf, Height=1.4mm, Manufacturer_Part_Number=LFSPXO018035Bulk, Mouser Price/Stock=https://www.mouser.com/Search/Refine.aspx?Keyword=449-LFSPXO018035BULK

## Via types
v1: diameter 0.6, hole 0.4, TopLayer to BottomLayer, tented both sides, 94 vias
v2: diameter 0.8, hole 0.4, TopLayer to BottomLayer, tented both sides, 60 vias

## Nets (pads, with @x,y where several pads share a name; then routed paths per layer and width w, separated by ;. In a path a pad name is that pad's centre, name@x,y a point inside that pad or via, vN(x,y) a via of type N, cw(c..) or ccw(c..) an arc to the next point about the centre after c; other vN are vias at no path point)
/ARST: IC1.137 IC2.8 | length 26.6
  TopLayer w0.2: IC1.137 31.91,25.025 32.245,25.36 34.347,25.36 35.857,26.87 35.857,46.52 35.56,46.817 34.79,46.817 IC2.8
/B/W: IC1.72 PL1.84 | length 18
  TopLayer w0.2: IC1.72 10.466,11.025 10.865,10.626 10.865,6.538 11.805,5.598 18.455,5.598 18.787,5.93 v1(18.787,6.791)
  BottomLayer w0.2: v1(18.787,6.791) 18.787,3.921 PL1.84
/FIQ: IC1.131 PL1.8 | length 20
  TopLayer w0.2: v1(29.527,11.344) 29.488,11.382 29.488,11.821 29.17,12.139 29.17,19.263 29.915,20.008 29.915,21.766 30.124,21.975 30.893,21.975 IC1.131
  BottomLayer w0.2: PL1.8 29.445,4.123 29.445,6.514 29.796,6.866 29.796,10.966 29.527,11.236 v1(29.527,11.344)
/IRQ: IC1.132 PL1.7 | length 20.9
  TopLayer w0.2: v1(28.806,10.65) 28.883,10.726 28.883,10.95 28.9,10.967 28.9,11.643 28.8,11.743 28.8,19.426 29.545,20.172 29.545,22.408 29.662,22.525 IC1.132
  BottomLayer w0.2: PL1.7 27.825,9.672 28.803,10.65 v1(28.806,10.65)
/MEMRQ: IC1.2 PL1.5 | length 32
  TopLayer w0.2: v1(22.641,23.674) 22.716,23.749 22.716,24.048 24.256,25.588 25.878,25.588 28.455,28.165 IC1.2
  BottomLayer w0.2: v1(22.641,23.674) 22.641,22.799 22.282,22.44 22.282,21.905 23.709,20.478 23.709,11.63 25.955,9.384 25.955,6.941 25.635,6.621 25.635,4.123 PL1.5
/R/W: IC1.71 IC4.1 PL1.3 | length 79.9
  TopLayer w0.2: IC1.71 9.417,11.475 8.648,11.475 8.169,10.996 8.169,10.094 10.466,7.797 10.466,6.236 11.583,5.119 22.745,5.119 ; v1(22.745,1.005) 22.745,5.119 ; v1(34.544,5.126) 34.537,5.119 22.745,5.119
  BottomLayer w0.2: v1(22.745,1.005) PL1.3 ; v1(34.544,5.126) 38.095,5.126 40.451,7.482 40.451,39.156 41.291,39.996 IC4.1
A0: IC1.75 PL1.44 | length 39
  TopLayer w0.2: IC1.75 12.455,10.252 23.525,21.322 23.525,22.614 23.803,22.892 v1(23.803,23)
  BottomLayer w0.2: PL1.44 18.935,32.751 20.698,30.988 24.259,30.988 24.891,30.356 26.006,30.356 26.965,29.397 26.965,25.81 24.985,23.83 24.63,23.83 23.803,23.003 v1(23.803,23)
A1: IC1.76 PL1.43 | length 38.2
  TopLayer w0.2: IC1.76 12.955,10.229 23.895,21.169 23.895,22.286 24.866,23.257 v1(24.866,23.26)
  BottomLayer w0.2: PL1.43 20.205,33.202 20.437,32.97 20.733,32.97 21.265,32.438 21.265,31.667 21.574,31.358 24.413,31.358 25.045,30.726 26.159,30.726 27.335,29.55 27.335,25.657 24.938,23.26 v1(24.866,23.26)
A2: IC1.77 PL1.42 | length 37.3
  TopLayer w0.2: IC1.77 13.455,10.205 24.514,21.265 24.514,22.011 v1(24.554,22.05)
  BottomLayer w0.2: PL1.42 21.635,35.617 21.635,32.197 22.104,31.728 24.566,31.728 25.198,31.096 26.312,31.096 27.705,29.703 27.705,25.293 24.554,22.142 v1(24.554,22.05)
A3: IC1.80 PL1.41 | length 35.5
  TopLayer w0.2: IC1.80 14.955,11.182 24.852,21.079 25.024,21.079 v1(25.084,21.139)
  BottomLayer w0.2: PL1.41 22.815,35.707 22.815,33.319 23.984,32.15 24.667,32.15 25.351,31.466 25.593,31.466 26.465,31.466 28.075,29.856 28.075,25.14 25.124,22.189 25.124,21.178 v1(25.084,21.139)
A4: IC1.81 PL1.40 | length 35.3
  TopLayer w0.2: IC1.81 15.455,11.159 24.676,20.38 25.578,20.38 v1(25.654,20.303)
  BottomLayer w0.2: PL1.40 24.365,35.427 24.365,32.975 25.504,31.836 26.619,31.836 28.445,30.01 28.445,24.987 25.654,22.196 v1(25.654,20.303)
A5: IC1.82 PL1.39 | length 34.6
  TopLayer w0.2: IC1.82 15.955,11.136 24.355,19.536 24.902,19.536 v1(24.955,19.588)
  BottomLayer w0.2: v1(24.955,19.588) 25.773,19.588 26.305,20.12 26.305,21.135 26.104,21.336 26.104,22.122 28.815,24.834 28.815,30.163 26.213,32.765 26.213,32.95 25.931,33.232 25.752,33.232 25.635,33.349 25.635,35.427 PL1.39
A6: IC1.83 PL1.38 | length 33.6
  TopLayer w0.2: IC1.83 16.455,11.112 24.298,18.955 25.158,18.955 26.685,20.482 26.685,21.786 v1(26.674,21.798)
  BottomLayer w0.2: PL1.38 26.905,35.427 26.905,32.596 29.185,30.316 29.185,24.68 27.048,22.544 27.048,22.272 26.674,21.897 v1(26.674,21.798)
A7: IC1.84 PL1.37 | length 33.2
  TopLayer w0.2: IC1.84 16.955,11.089 24.394,18.528 25.254,18.528 27.413,20.687 27.413,21.125 v1(27.418,21.13)
  BottomLayer w0.2: v1(27.418,21.13) 27.418,22.39 29.555,24.527 29.555,30.469 27.825,32.199 PL1.37
A8: IC1.85 PL1.36 | length 32.8
  TopLayer w0.2: IC1.85 17.455,11.066 24.547,18.158 25.408,18.158 27.988,20.738 27.988,21.883 28.165,22.06 v1(28.165,22.169)
  BottomLayer w0.2: v1(28.165,22.169) 28.628,22.632 28.628,23.077 29.925,24.374 29.925,32.203 29.095,33.033 PL1.36
A9: IC1.86 PL1.35 | length 32.4
  TopLayer w0.2: IC1.86 17.955,11.042 24.7,17.788 25.561,17.788 28.528,20.755 28.528,21.194 v1(28.605,21.271)
  BottomLayer w0.2: v1(28.605,21.271) 28.655,21.321 28.655,21.871 28.998,22.214 28.998,22.924 30.295,24.221 30.295,35.707 PL1.35
A10: IC1.87 PL1.34 | length 32.9
  TopLayer w0.2: IC1.87 18.455,11.019 24.654,17.218 v1(25.455,17.218)
  BottomLayer w0.2: v1(25.455,17.218) 25.455,17.302 25.837,17.684 25.837,18.064 26.335,18.562 26.703,18.562 29.368,21.228 29.368,22.771 30.665,24.067 30.665,30.942 31.635,31.912 PL1.34
A11: IC1.88 PL1.31 | length 32.2
  TopLayer w0.2: IC1.88 18.955,10.996 24.494,16.535 25.805,16.535 26.378,17.108 26.378,17.575 v1(26.407,17.605)
  BottomLayer w0.2: v1(26.407,17.605) 29.738,20.936 29.738,22.617 31.035,23.914 31.035,29.636 32.341,30.942 35.944,30.942 PL1.31
A12: IC1.89 PL1.30 | length 31.1
  TopLayer w0.2: IC1.89 19.455,10.973 24.483,16.001 25.199,16.001 v1(25.235,15.965)
  BottomLayer w0.2: v1(25.235,15.965) 26.305,17.035 26.685,17.035 30.108,20.458 30.108,22.464 31.405,23.761 31.405,29.246 32.286,30.127 36.015,30.127 PL1.30
A13: IC1.94 PL1.29 | length 28.4
  TopLayer w0.2: IC1.94 21.955,12.949 24.401,15.395 25.59,15.395 26.166,15.972 v1(26.622,16.428)
  BottomLayer w0.2: v1(26.622,16.428) 30.478,20.284 30.478,22.311 31.796,23.629 31.796,28.025 32.436,28.665 PL1.29
A14: IC1.95 PL1.28 | length 26.6
  TopLayer w0.2: IC1.95 22.455,12.926 24.554,15.025 26.026,15.025 27.06,16.06 27.322,16.06 27.742,16.479 v1(27.752,16.479)
  BottomLayer w0.2: v1(27.752,16.479) 27.816,16.479 28.755,17.418 28.755,17.802 30.848,19.895 30.848,22.157 32.166,23.476 32.166,25.842 33.719,27.395 PL1.28
A15: IC1.96 PL1.27 | length 25.1
  TopLayer w0.2: IC1.96 22.955,12.903 24.617,14.565 26.569,14.565 v1(27.494,15.49)
  BottomLayer w0.2: v1(27.494,15.49) 27.568,15.49 29.125,17.046 29.125,17.648 31.218,19.742 31.218,22.004 32.665,23.452 32.665,24.875 33.565,25.775 35.857,25.775 PL1.27
A16: IC1.97 PL1.26 | length 23.9
  TopLayer w0.2: IC1.97 23.455,12.88 24.51,13.935 v1(26.375,13.935)
  BottomLayer w0.2: v1(26.375,13.935) 27.36,14.92 27.73,14.92 29.495,16.685 29.495,17.495 31.588,19.588 31.588,21.581 33.043,23.036 33.043,24.275 33.623,24.855 PL1.26
A17: IC1.98 PL1.25 | length 22.1
  TopLayer w0.2: IC1.98 23.955,12.413 24.279,12.737 v1(24.279,12.845)
  BottomLayer w0.2: v1(24.279,12.845) 24.999,13.565 25.939,13.565 26.139,13.365 26.698,13.365 29.865,16.532 29.865,17.342 31.958,19.435 31.958,21.425 33.568,23.035 33.832,23.035 34.382,23.585 PL1.25
A18: IC1.99 PL1.24 | length 21
  TopLayer w0.2: IC1.99 24.455,10.888 24.397,10.945 24.397,12.157 25.235,12.995 v1(25.268,12.995)
  BottomLayer w0.2: v1(25.268,12.995) 26.308,12.995 26.497,12.806 26.663,12.806 30.235,16.378 30.235,17.189 32.328,19.282 32.328,21.272 33.371,22.315 PL1.24
A19: IC1.100 PL1.23 | length 18.8
  TopLayer w0.2: IC1.100 24.955,11.909 v1(24.967,11.921)
  BottomLayer w0.2: v1(24.967,11.921) 25.472,12.425 25.729,12.425 25.805,12.502 26.278,12.502 26.354,12.425 26.805,12.425 30.605,16.225 30.605,17.035 32.076,18.507 33.492,19.922 33.492,20.168 33.492,20.595 33.609,20.712 35.874,20.712 PL1.23
A20: IC1.101 PL1.22 | length 17
  TopLayer w0.2: IC1.101 25.455,11.345 v1(26.042,11.932)
  BottomLayer w0.2: v1(26.042,11.932) 26.52,11.932 26.643,12.055 26.958,12.055 30.975,16.072 30.975,16.882 32.446,18.354 33.518,19.425 35.857,19.425 PL1.22
A21: IC1.104 PL1.21 | length 15.1
  TopLayer w0.2: IC1.104 26.955,10.64 27.057,10.743 v1(27.057,11.34)
  BottomLayer w0.2: v1(27.057,11.34) 27.057,11.449 27.313,11.705 27.313,11.875 31.345,15.907 31.345,16.729 33.121,18.505 PL1.21
A22: IC1.105 IC4.5 PL1.20 | length 42.3
  TopLayer w0.2: IC1.105 27.505,9.087 27.505,10.419 v1(27.563,10.477)
  BottomLayer w0.2: v1(27.563,10.477) 27.563,11.04 27.683,11.16 27.683,11.722 31.715,15.753 31.715,16.519 32.611,17.415 36.027,17.415 PL1.20 38.846,17.235 38.964,17.352 38.964,36.393 36.211,39.146 IC4.5
A23: IC1.106 PL1.19 | length 12.5
  TopLayer w0.2: IC1.106 27.967,9.049 27.967,10.075 28.231,10.339 28.231,11.461 v1(28.253,11.483)
  BottomLayer w0.2: v1(28.253,11.483) 28.273,11.483 32.085,15.295 32.085,15.556 32.494,15.965 PL1.19
A24: IC1.107 IC4.4 PL1.18 | length 42
  TopLayer w0.2: IC1.107 28.505,9.087 28.505,9.856 28.693,10.045 29.787,10.045 29.866,9.966 v1(30.645,9.966)
  BottomLayer w0.2: v1(30.645,9.966) 30.645,11.607 33.492,14.454 35.966,14.454 PL1.18 38.936,14.695 39.341,15.1 39.341,36.539 37.481,38.399 IC4.4
A25: IC1.108 IC4.2 PL1.17 | length 41.7
  TopLayer w0.2: IC1.108 28.955,9.334 29.005,9.384 v1(31.486,9.384)
  BottomLayer w0.2: v1(31.486,9.384) 31.486,11.726 33.185,13.425 PL1.17 36.464,13.682 38.848,13.682 39.711,14.545 39.711,39.624 40.021,39.934 IC4.2
ABE: IC1.74 PL1.45 R8.1 | length 47.6
  TopLayer w0.2: IC1.74 11.955,10.275 22.955,21.275 v1(22.955,22.116) ; v2(17.713,38.862) 17.713,35.82 18.076,35.457 18.076,34.725 R8.1
  BottomLayer w0.2: v2(17.713,38.862) 17.713,35.825 PL1.45 17.665,33.146 20.193,30.618 24.105,30.618 25.113,29.61 25.882,29.61 26.595,28.896 26.595,26.319 25.406,25.13 23.798,25.13 23.211,24.543 23.211,22.816 23.032,22.637 23.032,22.193 v1(22.955,22.116)
ABORT: IC1.138 PL1.6 | length 24.4
  TopLayer w0.2: v1(26.06,10.685) 26.06,11.144 26.612,11.696 26.612,11.95 28.347,13.685 28.347,19.841 29.175,20.67 29.175,24.526 30.124,25.475 30.893,25.475 IC1.138
  BottomLayer w0.2: v1(26.06,10.685) 26.555,10.19 PL1.6
ALE: IC1.117 PL1.16 | length 13.4
  TopLayer w0.2: IC1.117 30.993,15.075 31.931,15.075 32.157,15.301 33.326,15.301 34.544,14.083 34.544,11.071 v1(33.462,9.989)
  BottomLayer w0.2: v1(33.462,9.989) 33.462,11.654 33.683,11.875 35.927,11.875 PL1.16
ARMFCLK: IC1.139 R1.2 | length 16.5
  TopLayer w0.2: IC1.139 31.984,26.025 32.279,25.73 34.193,25.73 34.477,26.014 35.487,27.024 35.487,37.016 35.2,37.303 R1.2
D0: IC1.7 PL1.46 | length 15.9
  TopLayer w0.2: IC1.7 25.96,30.508 25.96,28.566 v1(26.025,28.501)
  BottomLayer w0.2: PL1.46 16.707,35.465 16.707,33.339 17.54,32.506 19.798,30.248 23.952,30.248 25.698,28.501 v1(26.025,28.501)
D1: IC1.8 PL1.47 | length 18.9
  TopLayer w0.2: IC1.8 25.455,28.205 25.455,27.852 25.735,27.572 v1(25.735,27.507)
  BottomLayer w0.2: PL1.47 15.305,35.597 15.305,33.225 15.605,32.925 15.605,32.365 16.504,31.466 17.352,31.466 18.94,29.878 23.465,29.878 25.583,27.76 25.583,27.724 25.735,27.572 v1(25.735,27.507)
D2: IC1.9 PL1.48 | length 22.3
  TopLayer w0.2: IC1.9 24.955,27.84 25.095,27.7 25.095,27.162 25.007,27.074 25.007,26.43 v1(25.005,26.427)
  BottomLayer w0.2: PL1.48 13.855,31.973 14.732,31.096 17.199,31.096 18.787,29.508 23.311,29.508 25.113,27.706 25.113,27.174 25.007,27.068 25.007,26.43 v1(25.005,26.427)
D3: IC1.10 PL1.49 | length 20.5
  TopLayer w0.2: IC1.10 24.457,30.511 24.457,28.911 24.448,28.903 24.448,28.164 24.548,28.064 24.548,27.489 v1(24.524,27.465)
  BottomLayer w0.2: PL1.49 12.585,32.578 14.65,30.513 17.258,30.513 18.633,29.138 23.158,29.138 24.448,27.848 24.448,27.541 v1(24.524,27.465)
D4: IC1.11 PL1.50 | length 22.5
  TopLayer w0.2: v1(23.952,26.633) 23.954,26.634 IC1.11 IC1.11
  BottomLayer w0.2: PL1.50 11.455,35.637 11.455,33.101 14.422,30.134 17.114,30.134 18.48,28.768 23.005,28.768 23.95,27.823 23.95,26.635 v1(23.952,26.633)
D5: IC1.12 PL1.51 | length 22.2
  TopLayer w0.2: v1(23.375,27.473) 23.312,27.537 23.312,28.31 23.455,28.454 IC1.12
  BottomLayer w0.2: PL1.51 10.045,32.248 12.529,29.764 16.961,29.764 18.327,28.398 22.852,28.398 23.298,27.951 23.298,27.55 v1(23.375,27.473)
D6: IC1.13 PL1.52 | length 24.4
  TopLayer w0.2: v1(22.805,26.615) 22.805,28.49 22.955,28.64 IC1.13
  BottomLayer w0.2: PL1.52 8.775,32.576 11.957,29.394 16.808,29.394 18.174,28.028 22.688,28.028 22.805,27.911 v1(22.805,26.615)
D7: IC1.14 PL1.53 | length 23
  TopLayer w0.2: v1(22.235,27.458) 22.295,27.518 22.295,28.626 22.455,28.786 IC1.14
  BottomLayer w0.2: PL1.53 7.505,32.979 11.46,29.024 16.655,29.024 18.02,27.658 21.155,27.658 21.355,27.458 v1(22.235,27.458)
D8: IC1.15 PL1.56 | length 22.6
  TopLayer w0.2: v1(21.445,26.845) 21.515,26.916 21.515,28.607 21.955,29.046 IC1.15
  BottomLayer w0.2: PL1.56 4.423,30.155 9.574,30.155 11.075,28.654 16.501,28.654 17.867,27.288 21.002,27.288 v1(21.445,26.845)
D9: IC1.20 PL1.57 | length 20
  TopLayer w0.2: IC1.20 19.449,30.507 19.449,27.41 19.531,27.328 v1(19.531,26.71)
  BottomLayer w0.2: PL1.57 10.218,28.665 10.654,28.228 16.341,28.228 17.86,26.71 v1(19.531,26.71)
D10: IC1.21 PL1.58 | length 23.5
  TopLayer w0.2: IC1.21 18.955,26.48 19.295,26.14 20.24,26.14 20.609,25.77 v1(20.678,25.77)
  BottomLayer w0.2: PL1.58 4.533,27.725 16.322,27.725 17.729,26.318 19.093,26.318 19.271,26.14 20.24,26.14 20.609,25.77 v1(20.678,25.77)
D11: IC1.22 PL1.59 | length 22.3
  TopLayer w0.2: IC1.22 18.455,26.433 19.313,25.576 19.638,25.576 v1(19.715,25.499)
  BottomLayer w0.2: PL1.59 6.685,26.125 7.675,27.115 16.408,27.115 17.575,25.948 18.94,25.948 19.313,25.576 19.638,25.576 v1(19.715,25.499)
D12: IC1.23 PL1.60 | length 20.2
  TopLayer w0.2: IC1.23 17.955,26.019 18.596,25.378 v1(18.704,25.378)
  BottomLayer w0.2: PL1.60 4.224,24.876 9.092,24.876 9.594,25.378 v1(18.704,25.378)
D13: IC1.24 PL1.61 | length 24.8
  TopLayer w0.2: IC1.24 17.455,25.821 18.483,24.793 20.423,24.793 v1(20.425,24.795)
  BottomLayer w0.2: PL1.61 8.708,23.585 9.916,24.793 20.423,24.793 v1(20.425,24.795)
D14: IC1.25 PL1.62 | length 28.7
  TopLayer w0.2: IC1.25 16.955,25.798 18.528,24.225 21.107,24.225 21.57,24.688 v1(21.635,24.688)
  BottomLayer w0.2: PL1.62 9.623,22.315 11.533,24.225 21.107,24.225 21.57,24.688 v1(21.635,24.688)
D15: IC1.26 PL1.63 | length 29.2
  TopLayer w0.2: IC1.26 16.455,25.775 18.375,23.855 20.775,23.855 20.963,23.667 v1(21.399,23.667)
  BottomLayer w0.2: PL1.63 4.45,20.798 8.63,20.798 11.686,23.855 20.775,23.855 20.963,23.667 v1(21.399,23.667)
D16: IC1.27 PL1.64 | length 28.7
  TopLayer w0.2: IC1.27 15.955,25.751 18.221,23.485 20.081,23.485 20.548,23.019 v1(20.605,23.019)
  BottomLayer w0.2: PL1.64 4.353,19.925 8.279,19.925 11.839,23.485 20.081,23.485 20.548,23.019 v1(20.605,23.019)
D17: IC1.28 PL1.65 | length 28.8
  TopLayer w0.2: IC1.28 15.455,25.728 18.068,23.115 19.394,23.115 19.831,22.677 19.831,22.378 v1(19.906,22.304)
  BottomLayer w0.2: PL1.65 7.789,18.505 12.399,23.115 19.094,23.115 v1(19.906,22.304)
D18: IC1.29 PL1.66 | length 30.3
  TopLayer w0.2: IC1.29 14.955,25.705 17.915,22.745 19.188,22.745 19.322,22.611 v1(19.322,21.368)
  BottomLayer w0.2: PL1.66 7.304,17.235 12.814,22.745 18.941,22.745 19.322,22.364 v1(19.322,21.368)
D19: IC1.30 PL1.67 | length 27.8
  TopLayer w0.2: IC1.30 14.455,25.682 17.762,22.375 17.999,22.375 18.148,22.227 18.623,22.227 v1(18.699,22.15)
  BottomLayer w0.2: PL1.67 4.553,16.315 6.908,16.315 9.098,18.505 12.968,22.375 17.999,22.375 18.148,22.227 18.623,22.227 v1(18.699,22.15)
D20: IC1.33 PL1.68 | length 27.9
  TopLayer w0.2: IC1.33 12.955,28.785 14.025,27.715 14.025,25.588 17.792,21.822 v1(17.792,21.731)
  BottomLayer w0.2: PL1.68 7.338,14.695 8.475,15.832 8.475,16.795 11.276,19.596 13.41,21.731 v1(17.792,21.731)
D21: IC1.34 PL1.69 | length 28.2
  TopLayer w0.2: IC1.34 12.455,28.761 13.655,27.561 13.655,25.435 16.68,22.41 16.68,21.499 17.069,21.11 v1(17.069,21.04)
  BottomLayer w0.2: PL1.69 4.473,13.695 7.169,13.695 8.89,15.416 8.89,16.615 13.376,21.101 17.007,21.101 v1(17.069,21.04)
D22: IC1.35 PL1.70 | length 28.6
  TopLayer w0.2: IC1.35 11.955,28.738 13.285,27.408 13.285,25.282 16.263,22.304 16.263,20.458 v1(16.258,20.453)
  BottomLayer w0.2: PL1.70 4.423,12.375 7.004,12.375 9.467,14.838 9.467,16.517 11.645,18.695 13.681,20.731 15.541,20.731 15.748,20.524 16.187,20.524 v1(16.258,20.453)
D23: IC1.36 PL1.71 | length 28.1
  TopLayer w0.2: IC1.36 11.455,28.715 12.915,27.255 12.915,25.128 15.305,22.738 15.305,20.194 v1(15.272,20.161)
  BottomLayer w0.2: PL1.71 4.553,11.235 6.895,11.235 10.205,14.544 10.205,16.675 13.691,20.161 v1(15.272,20.161)
D24: IC1.37 PL1.72 | length 28.2
  TopLayer w0.2: IC1.37 11.122,28.525 12.545,27.102 12.545,24.879 14.675,22.749 v1(14.675,19.336)
  BottomLayer w0.2: PL1.72 7.293,9.615 11.435,13.757 11.435,15.03 14.675,18.27 v1(14.675,19.336)
D25: IC1.38 PL1.73 | length 30.5
  TopLayer w0.2: IC1.38 11.098,28.025 12.175,26.948 12.175,24.726 14.006,22.895 14.006,19.163 14.454,18.715 15.184,18.715 15.527,19.057 v1(15.635,19.057)
  BottomLayer w0.2: PL1.73 4.553,8.695 6.896,8.695 11.805,13.604 11.805,14.877 15.045,18.117 15.045,18.586 15.162,18.703 15.173,18.703 15.527,19.057 v1(15.635,19.057)
D26: IC1.39 PL1.74 | length 33.8
  TopLayer w0.2: IC1.39 9.517,27.475 11.125,27.475 11.805,26.795 11.805,24.573 13.636,22.742 13.636,19.009 14.3,18.345 17.078,18.345 v1(17.139,18.284)
  BottomLayer w0.2: PL1.74 6.028,7.075 6.315,7.362 6.886,7.362 7.004,7.479 7.004,8.279 12.175,13.451 12.175,14.724 15.796,18.345 17.078,18.345 v1(17.139,18.284)
D27: IC1.43 PL1.77 | length 29.1
  TopLayer w0.2: IC1.43 10.528,25.525 11.435,24.618 11.435,24.419 13.212,22.643 13.212,18.885 14.388,17.709 v1(16.217,17.709)
  BottomLayer w0.2: PL1.77 10.045,5.598 10.333,5.886 10.333,6.977 12.635,9.279 12.635,14.612 15.731,17.709 v1(16.217,17.709)
D28: IC1.44 PL1.78 | length 29.6
  TopLayer w0.2: IC1.44 10.505,25.025 11.065,24.464 11.065,24.266 12.755,22.576 12.755,18.819 14.466,17.108 17.008,17.108 v1(17.013,17.103)
  BottomLayer w0.2: PL1.78 11.622,4.08 11.622,7.743 13.005,9.125 13.005,14.459 15.653,17.108 17.008,17.108 v1(17.013,17.103)
D29: IC1.45 PL1.79 | length 26.9
  TopLayer w0.2: IC1.45 9.517,24.475 10.333,24.475 12.385,22.423 12.385,18.665 14.533,16.517 v1(16.2,16.517)
  BottomLayer w0.2: PL1.79 12.585,8.183 13.375,8.972 13.375,14.306 15.586,16.517 v1(16.2,16.517)
D30: IC1.46 PL1.80 | length 24.9
  TopLayer w0.2: IC1.46 9.517,23.975 10.31,23.975 12.015,22.27 12.015,18.504 14.963,15.556 v1(15.731,15.556)
  BottomLayer w0.2: PL1.80 13.855,14.263 15.131,15.539 15.714,15.539 v1(15.731,15.556)
D31: IC1.47 PL1.81 | length 23.3
  TopLayer w0.2: IC1.47 9.517,23.475 10.286,23.475 11.645,22.116 11.645,18.053 15.027,14.671 v1(15.069,14.671)
  BottomLayer w0.2: v1(15.069,14.671) 15.021,14.671 14.234,13.884 14.234,7.028 14.765,6.497 14.765,6.065 14.775,6.055 14.775,4.123 PL1.81
DBE: IC1.4 PL1.83 | length 31.6
  TopLayer w0.2: v1(25.999,26.529) 26.005,26.529 27.455,27.98 IC1.4
  BottomLayer w0.2: PL1.83 17.665,10.229 20.075,12.639 20.075,21.537 22.071,23.533 22.071,23.926 23.645,25.5 24.975,25.5 25.999,26.524 v1(25.999,26.529)
GND: C1.2 C2.2 C3.2 C4.2 C5.2 C6.2 C7.2 C8.2 C9.2 C10.2 C11.2 C12.2 C13.2 C14.2 C15.2 C17.2 C18.1 C19.2 C20.2 C22.2 C23.2 IC1.5 IC1.16 IC1.18 IC1.32 IC1.40 IC1.41 IC1.59 IC1.60 IC1.62 IC1.63 IC1.64 IC1.65 IC1.66 IC1.67 IC1.68 IC1.69 IC1.78 IC1.91 IC1.93 IC1.103 IC1.113 IC1.121 IC1.123 IC1.124 IC1.125 IC1.126 IC1.127 IC1.128 IC1.129 IC1.130 IC1.136 IC1.142 IC1.144 IC2.7 IC2.10 IC2.11 IC2.12 IC4.7 IC4.9 IC4.10 IC4.12 IC4.13 IC5.4 IC5.5 IC5.7 IC5.9 IC5.10 IC5.12 IC5.13 PL1.33 PL1.54 PL1.75 R3.1 R4.1 X1.2 X2.2 | length 12.6
  TopLayer w0.2: C15.2 11.955,32.081 12.165,31.871 13.089,31.871 13.405,31.555 13.405,30.563 IC1.32 ; C6.2@17.717,6.95 C6.2 ; IC1.16 21.455,31.551 21.651,31.746 22.109,31.746 22.402,32.039 22.402,32.523 v2(22.455,32.576) ; IC1.5 IC1.5@27.005,30.563 ; IC1.113 32.172,13.025 32.849,13.702 C9.2
  TopLayer w0.3: IC1.142 31.797,27.525 32.3,28.028 32.3,28.435 32.77,28.905 32.77,29.505 32.93,29.665 C11.2
  other v1: 15.805,0.661 27.176,0.661 35.052,3.658 13.285,6.88 17.069,6.95 32.849,8.795 39.384,9.134 10.045,9.856 11.957,12.175 10.865,14.533 32.665,14.66 11.46,16.519 20.845,20.025 32.905,20.355 24.524,24.464 37.542,35.091 34.747,35.923 32.094,39.189 38.482,39.189
  other v2: 1.928,1.233 6.404,1.233 36.576,1.346 1.27,5.119 4.93,5.119 41.224,5.994 23.955,7.044 8.125,7.075 29.005,7.248 20.605,11.04 0.845,13.175 41.885,14.072 19.322,18.665 0.845,20.225 18.115,20.525 0.845,25.305 41.885,25.305 21.949,25.777 11.075,26.433 7.145,29.485 7.728,31.292 32.574,32.081 10.94,32.3 16.605,32.396 3.28,34.206 41.885,35.777 1.202,36.144 9.627,40.256 1.727,41.189 20.205,43.459 34.087,44.171 37.481,44.588 41.885,44.588 26.84,45.013 21.955,45.309 1.422,47.092 9.467,47.183
maskSEQ: IC5.3 PL1.15 | length 50.4
  BottomLayer w0.2: IC5.3 26.84,42.548 27.432,42.548 27.897,43.013 40.579,43.013 40.696,42.896 40.696,40.086 40.081,39.471 40.081,14.341 39.116,13.376 39.116,11.533 38.665,11.082 36.404,11.082 PL1.15
NetC18_2: C18.2 R9.1 | length 1.2
  TopLayer w0.2: C18.2 R9.1
NetIC2_2: IC2.2 IC2.6 | length 7.4
  TopLayer w0.2: IC2.2 28.415,42.586 28.532,42.703 33.227,42.703 33.495,42.435 IC2.6
NetIC2_5: IC2.5 R1.1 | length 3.6
  TopLayer w0.2: IC2.5 32.448,41.195 32.448,40.2 33.344,39.303 R1.1
nTRST: IC1.50 R3.2 | length 3.4
  TopLayer w0.2: R3.2 6.682,22.998 7.442,22.998 8.406,22.034 9.458,22.034 IC1.50
nVIDC_Write_maybe: IC4.6 IC5.1 | length 7.4
  BottomLayer w0.2: IC5.1 29.495,41.602 29.495,42.318 29.727,42.551 34.747,42.551 34.862,42.435 34.862,41.582 IC4.6
nWAIT: IC1.143 R2.1 | length 3.4
  TopLayer w0.2: R2.1 30.478,30.055 29.795,29.372 29.795,28.142 29.912,28.025 IC1.143
OscClk: IC2.3 X1.3 X2.3 | length 17.6
  TopLayer w0.2: X2.3 17.755,45.489 19.042,46.776 X1.3 20.193,44.761 24.697,40.256 29.356,40.256 29.628,40.529 IC2.3@29.628,41.361 ; IC2.3@29.511,41.244 IC2.3@29.628,41.361 ; IC2.3 IC2.3@29.628,41.361
PHI2: IC1.140 PL1.1 R9.2 | length 32.6
  TopLayer w0.2: v1(21.635,20.89) 21.635,21.828 23.252,23.446 23.252,24.061 24.321,25.13 26.059,25.13 27.455,26.525 IC1.140 R9.2@33.224,26.525
  TopLayer w0.4: R9.2@33.224,26.525 R9.2
  BottomLayer w0.2: PL1.1 20.205,9.412 21.635,10.841 v1(21.635,20.89)
RST: IC2.13 PL1.9 | length 68.7
  TopLayer w0.2: IC2.13 28.445,46.812 v1(28.445,44.389)
  BottomLayer w0.2: v1(28.445,44.389) 28.445,43.659 28.721,43.383 41.205,43.383 42.037,42.551 42.037,40.219 40.821,39.003 40.821,7.329 34.497,1.005 30.482,1.005 30.365,1.122 PL1.9
SEQ: IC1.3 IC5.2 | length 11
  TopLayer w0.2: IC1.3 v1(27.955,39.471)
  BottomLayer w0.2: v1(27.955,39.471) 27.955,41.332 IC5.2
TCK: IC1.53 R7.1 | length 3.1
  TopLayer w0.2: R7.1 7.004,19.575 7.525,19.575 8.475,20.525 IC1.53
TDI: IC1.49 R5.1 | length 3.4
  TopLayer w0.2: R5.1@6.682,23.92 6.727,23.875 7.285,23.875 8.585,22.575 9.417,22.575 IC1.49
TDO: IC1.48 R4.2 | length 4
  TopLayer w0.2: R4.2 7.438,24.876 8.459,23.855 8.459,23.224 8.608,23.075 9.417,23.075 IC1.48
TMS: IC1.52 R6.1 | length 3
  TopLayer w0.2: R6.1 7.583,20.225 8.383,21.025 IC1.52
TRANS: PL1.10 R10.1 | length 4.2
  TopLayer w0.2: v2(31.565,6.93) R10.1@31.565,7.865
  TopLayer w0.4: R10.1 R10.1@31.565,7.865
  BottomLayer w0.2: v2(31.565,6.93) 31.6,6.896 31.6,3.808 PL1.10
VCC: C1.1 C2.1 C3.1 C4.1 C5.1 C6.1 C7.1 C8.1 C9.1 C10.1 C11.1 C12.1 C13.1 C14.1 C15.1 C17.1 C19.1 C20.1 C22.1 C23.1 IC1.1 IC1.6 IC1.17 IC1.19 IC1.31 IC1.42 IC1.51 IC1.61 IC1.70 IC1.79 IC1.90 IC1.92 IC1.102 IC1.112 IC1.122 IC1.141 IC2.1 IC2.4 IC2.14 IC4.14 IC5.14 PL1.11 PL1.32 PL1.55 PL1.82 R2.2 R5.2 R6.2 R7.2 R8.2 R10.2 X1.4 X2.4 | length 111.5
  TopLayer w0.2: R7.2 R6.2 5.754,20.225 6.404,20.875 6.454,20.875 6.469,20.89 6.835,20.89 7.045,21.1 C2.1 ; C1.1@6.749,26.525 C1.1@6.869,26.405 ; C3.1@6.845,16.885 C3.1 7.205,16.525 7.415,16.525 IC1.61 ; C1.1 7.374,26.525 C1.1@7.524,26.375 ; C4.1 7.305,11.675 8.125,11.675 8.475,12.025 IC1.70 ; C1.1@7.48,26.375 C1.1@7.524,26.375 ; v2(7.524,25.751) C1.1@7.524,26.375 ; v2(7.944,21.548) 7.956,21.537 9.455,21.537 IC1.51 ; IC1.42 8.475,26.025 8.125,26.375 C1.1@7.524,26.375 ; IC1.31 C15.1 ; C5.1@14.455,7.358 IC1.79 ; R8.2 19.196,34.695 19.596,34.295 C14.1 C14.1@19.596,32.669 ; C14.1@19.605,32.41 19.605,32.081 19.955,31.731 IC1.19 ; C6.1 19.955,7.012 19.955,7.248 IC1.90 ; C7.1 20.955,7.248 IC1.92 ; IC1.17 20.955,31.742 21.155,31.942 21.155,32.15 C13.1@21.305,32.3 ; C13.1@21.305,32.576 C13.1 C13.1@21.305,33.176 ; C8.1 IC1.102 ; C12.1@26.307,32.651 C12.1 26.455,32.703 IC1.6 ; IC1.1 v1(28.955,32.016) ; v2(30.932,39.934) 30.932,41.395 IC2.4 ; IC1.112 30.973,12.495 31.841,12.495 32.424,11.912 32.639,11.912 32.739,11.812 C9.1@32.739,11.702 ; IC1.122 33.043,17.525 C10.1 ; R10.2 32.65,7.895 32.65,6.95 v2(32.665,6.935) ; C9.1@33.034,11.702 C9.1
  TopLayer w0.3: v2(1.287,31.205) 1.287,27.455 4.767,23.975 R5.2 ; C19.1 2.152,44.743 2.312,44.903 2.312,45.63 2.462,45.78 v2@2.462,46.05 ; v2(2.462,45.915) 3.323,46.776 X1.4 ; v2(7.675,45.013) C20.1 12.299,45.013 X2.4 ; R2.2 30.478,31.255 30.932,31.709 30.932,32.13 v1(30.99,32.187) ; IC1.141 32.13,27.025 32.61,27.505 33.195,27.505 C11.1
  TopLayer w0.4: C2.1 7.068,21.548 v2(7.944,21.548) ; C3.1 7.305,16.675 7.415,16.565 7.415,16.525 v2(7.415,15.875) ; C4.1@7.305,11.675 7.415,11.565 v2(7.415,10.685) ; C1.1@7.374,26.525 7.414,26.525 7.524,26.415 C1.1@7.524,26.375 ; C15.1 14.065,32.396 v2(14.805,32.396) ; C5.1 14.455,7.248 v2(15.272,7.248) ; C14.1@19.605,32.41 19.715,32.3 v2(20.455,32.3) C13.1@21.305,32.3 ; C6.1 19.805,7.012 19.805,7.248 20.955,7.248 v1(21.805,7.248) ; v2(25.113,7.044) 25.845,7.044 25.955,6.934 C8.1 ; IC2.1 v2(27.145,43.323) ; v2(32.366,10.078) 32.366,10.138 32.739,10.512 32.739,11.592 32.849,11.702 C9.1@33.034,11.702 ; v2(32.933,16.635) 32.933,17.415 C10.1@33.043,17.525 ; C11.1 33.78,27.665 34.747,28.632 v2(34.747,33.678) ; C22.1 39.791,46.407 40.579,45.619 v2(40.579,45.511)
  TopLayer w0.5: v2(25.285,43.967) 25.271,43.982 25.271,45.309 C17.1 25.256,45.748 25.316,45.808 25.431,45.808 26.363,46.74 27.07,46.74 27.145,46.815 IC2.14
  TopLayer w0.6: v1(25.522,32.625) 25.547,32.651 C12.1@26.307,32.651
  BottomLayer w0.4: v2(15.272,7.248) 16.145,6.376 16.145,4.023 PL1.82 ; v2(29.368,45.309) 29.374,45.314 29.374,46.905 IC5.14 ; IC5.14@29.38,47.076 29.505,47.201 C23.1@31.848,47.201 ; v2(40.579,45.511) 41.166,46.098 41.166,46.802 IC4.14
  BottomLayer w0.6: v2(1.287,31.205) PL1.55 PL1.55@6.015,31.205 ; v2(32.665,6.935) 32.665,6.88 32.755,6.791 32.755,5.126 PL1.11@32.913,4.968 ; v2(34.747,33.678) 34.747,32.625 34.892,32.48 PL1.32@35.085,32.48
pads on no net: IC1.54 IC1.55 IC1.56 IC1.57 IC1.58 IC1.73 IC1.109 IC1.110 IC1.111 IC1.114 IC1.115 IC1.116 IC1.118 IC1.119 IC1.120 IC1.133 IC1.134 IC1.135 IC2.9 IC4.3 IC4.8 IC4.11 IC5.6 IC5.8 IC5.11 PL1.2 PL1.4 PL1.12 PL1.13 PL1.14 PL1.76 X1.1 X2.1

## Polygon pours and split planes (outlines as drawn)
GND on GND "GND_L02_P000" (solid, pour order 0): 0,0 0,48.768 42.621,48.768 42.621,0
VCC on VCC "VCC_L03_P001" (solid, pour order 1): 0,0 0,48.768 42.621,48.768 42.621,0
GND on TopLayer "GND_L01_P002" (solid, remove dead copper, pour order 2): 0,48.768 42.621,48.768 42.621,-1.003 0,-1.003
GND on BottomLayer "GND_L04_P003" (solid, remove dead copper, pour order 3): 0,0 0,48.768 42.621,48.768 42.621,0

## Silkscreen, mask and mechanical layers (free items; w line width, h text height)
TopOverlay:
  text "." at 14.53,31.529 h1 r90
  text "." at 19.529,31.513 h1 r90
  text "." at 24.541,31.476 h1 r90
  text "36" at 9.184,30.088 h1
  text "144" at 32.203,29.029 h1 r90
  text "." at 8.384,26.941 h1 r90
  text "." at 32.128,26.441 h1 r90
  text "." at 8.394,21.943 h1 r90
  text "." at 32.159,21.434 h1 r90
  text "." at 8.358,16.913 h1 r90
  text "." at 32.204,16.476 h1 r90
  text "(C) IanJ, 2025" at 41.083,16.107 h1 r90
  text "JLCJLCJLCJLC" at 14.322,14.453 h1 r90
  text "." at 8.378,11.942 h1 r90
  text "." at 32.164,11.458 h1 r90
  text "72" at 8.285,9.612 h1
  text "108" at 29.727,8.395 h1
  text "." at 25.038,7.876 h1 r90
  text "." at 15.046,7.862 h1 r90
  text "." at 20.045,7.865 h1 r90
BottomOverlay:
  region: 32.534,9.347 32.531,9.343 32.531,7.422 30.619,7.422 30.605,7.436
  text "ARM610/710" at 19.905,42.718 h2
TopSolder:
  text "ARM610/710" at 1.245,1.405 h2.2
Mechanical3:
  lines w0.2: 41.292,48.768 0,48.768 0,0 37.287,0 42.621,5.334 42.621,47.549 41.402,48.768
Mechanical4:
  lines w0.2: 41.292,48.768 0,48.768 0,0 37.287,0 42.621,5.334 42.621,47.549 41.402,48.768